# EAGLE board ITG-3200_Breakout-Panel-v12 (EAGLE 6.5.0), part 1 of 3
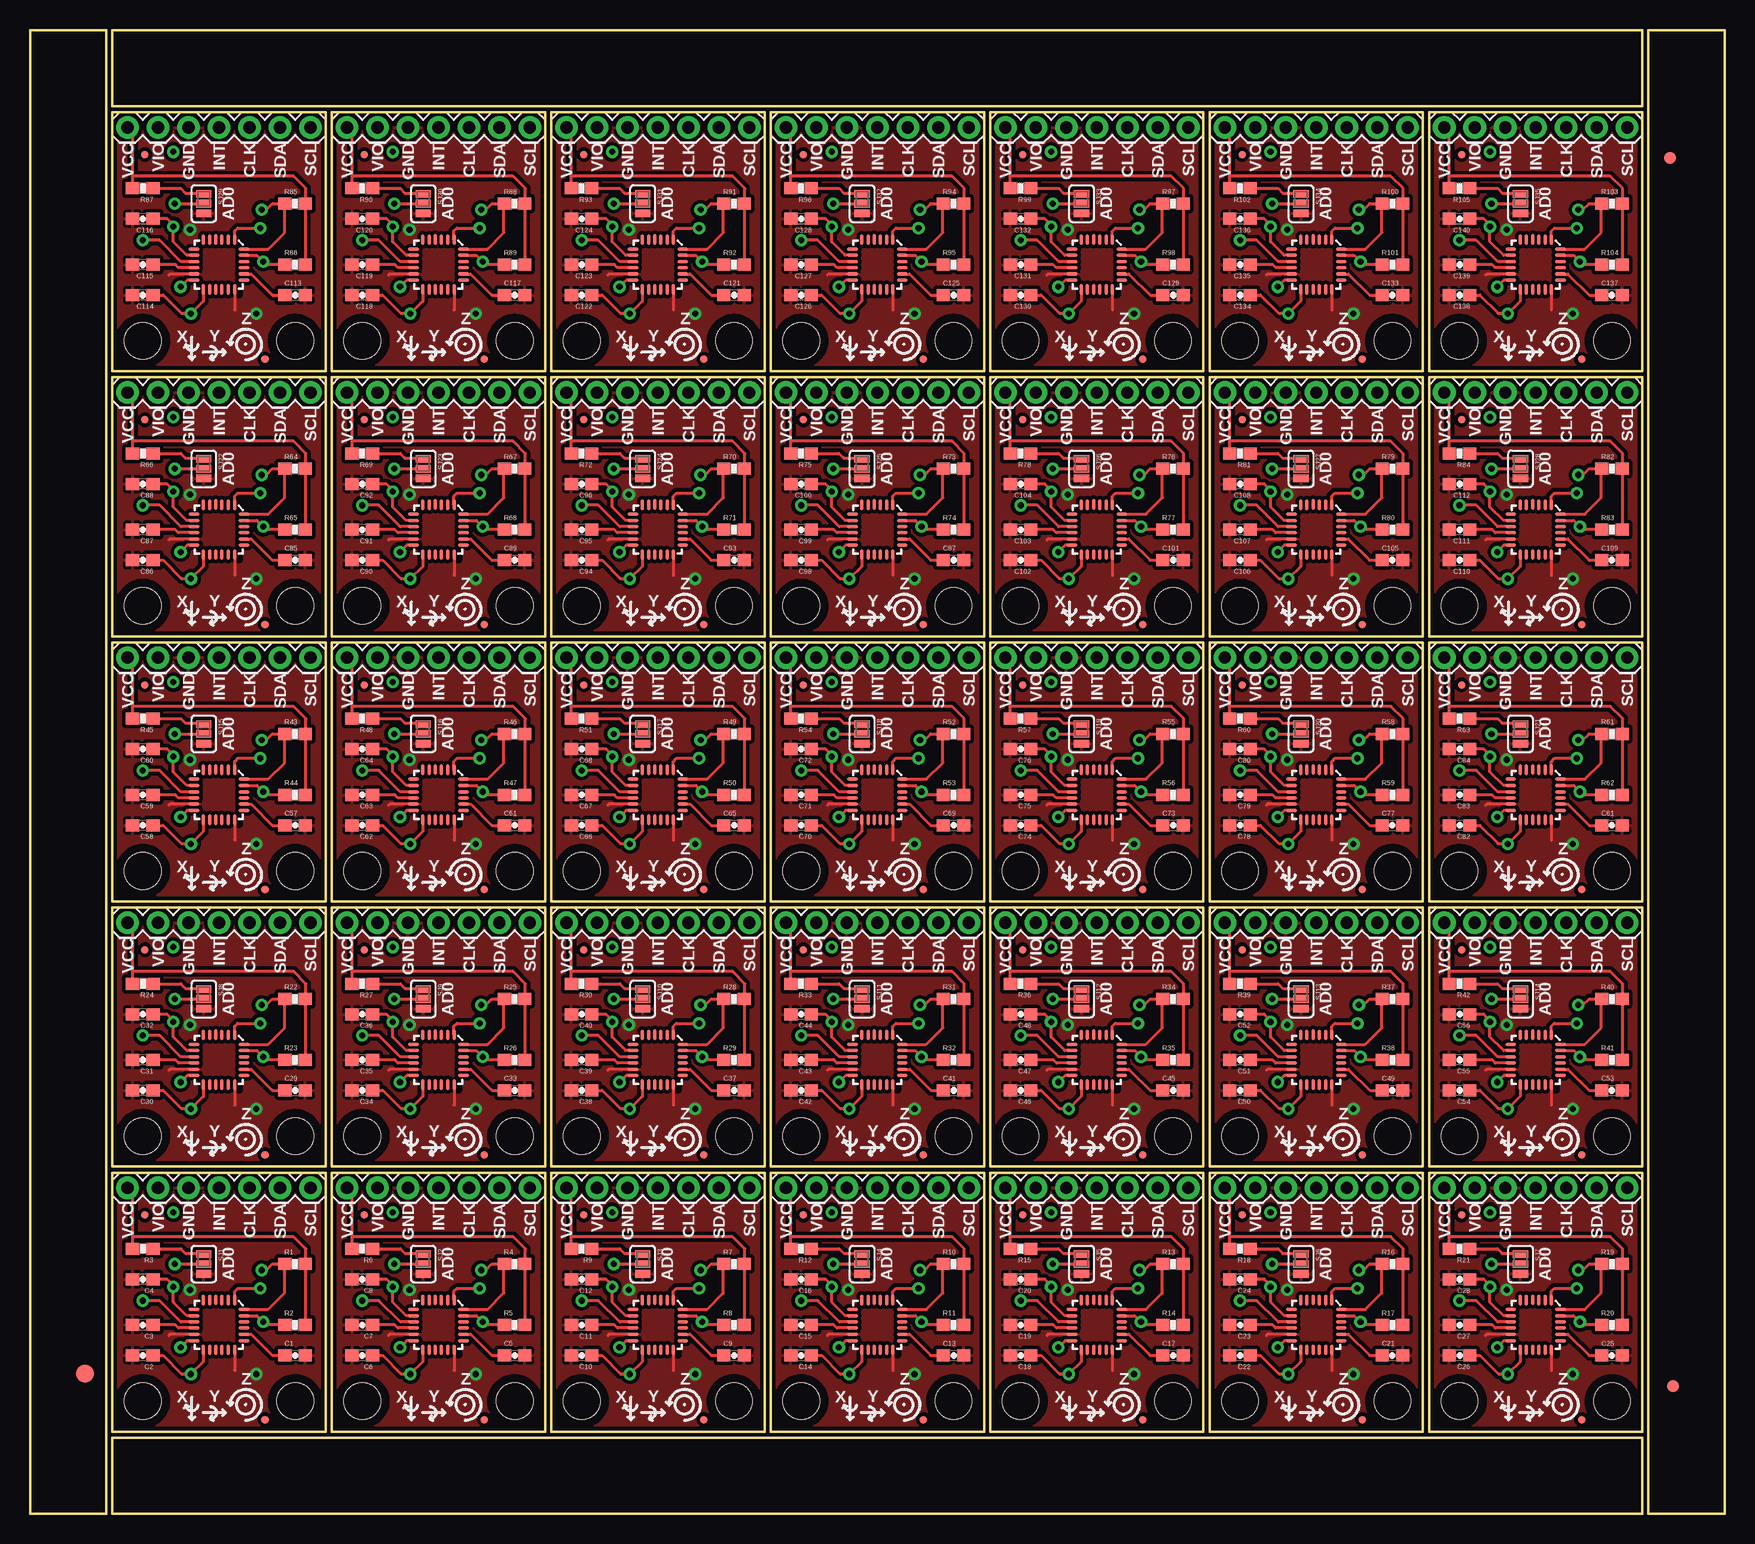
[diagram p0: board, top side]
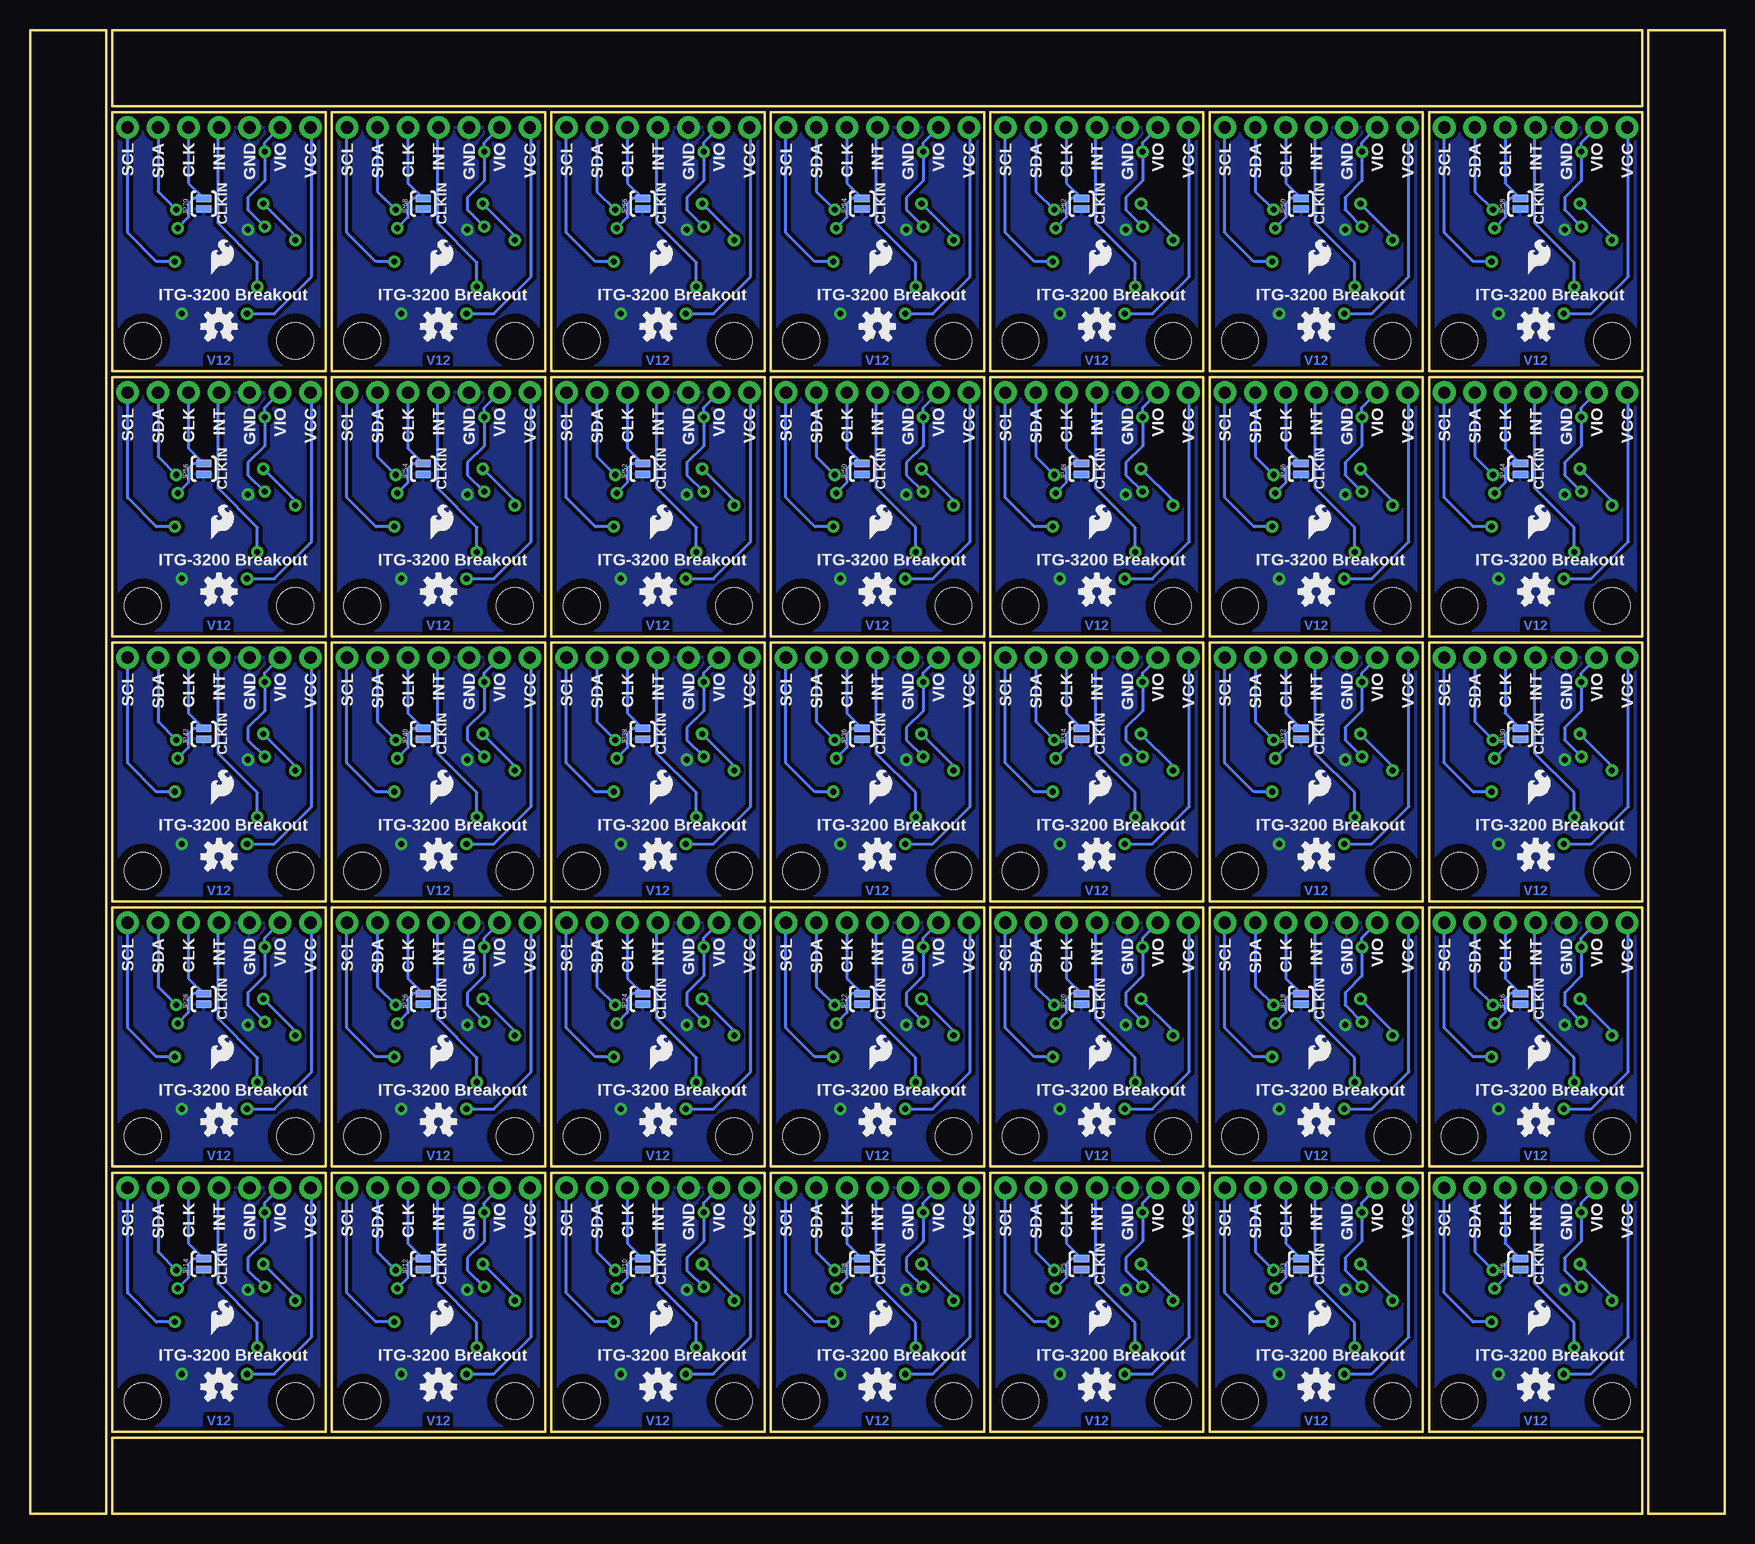
[diagram p1: board, bottom side, seen from below]

Size 141.22 x 123.7 mm. Coordinates in mm from the lower left corner, seen from the top.
Outline: 158 segments
Copper layers (1*16): Top 0.035mm / dielectric 1.5mm / Bottom 0.035mm
Design rules "SparkFun": minimum track width 7mil, minimum drill 15mil, track to track 8mil, track to pad 8mil, pad to pad 8mil, via to via 8mil, smd to smd 8mil, copper to edge 8mil, drill to drill 8mil, minimum pad ring 12mil, minimum via ring 10mil, stop-mask expansion 4mil, vias tented up to drill 20mil, thermal gap 10mil
tRestrict: area 17.2,13.3 to 17.4,14; area 35.5,13.3 to 35.7,14; area 53.8,13.3 to 54,14; area 72.1,13.3 to 72.3,14; area 90.3,13.3 to 90.6,14; area 108.6,13.3 to 108.9,14; area 126.9,13.3 to 127.2,14; area 17.2,35.4 to 17.4,36.1; area 35.5,35.4 to 35.7,36.1; area 53.8,35.4 to 54,36.1; area 72.1,35.4 to 72.3,36.1; area 90.3,35.4 to 90.6,36.1; 23 more areas

## Footprints (pad centres in the part's own frame; a part is rotated, then mirrored left to right if it is on the bottom)
0603-CAP = smd 1.1 x 1: 1 -0.85,0; 2 0.85,0
FIDUCIAL-1.5X3 = smd 1.5 x 1.5: 1 0,0
FIDUCIAL-1X2 = smd 1 x 1: 1 0,0
MICRO-FIDUCIAL = smd 0.635 x 0.635: 1 0,0
1X07 = drill 1.016 pad 1.88: 1 0,0; 2 2.54,0; 3 5.08,0; 4 7.62,0; 5 10.16,0; 6 12.7,0; 7 15.24,0
SJ_2S-NO = smd 0.635 x 1.27: 1 -0.45,0; 2 0.45,0
0603-RES = smd 1.1 x 1: 1 -0.85,0; 2 0.85,0
SJ_3_PASTE1&2 = smd 0.635 x 1.27: 1 -0.813,0; 2 0,0; 3 0.813,0
QFN-24_ITG3200_1:1 = smd 0.889 x 0.279: 1 -2.076,1.301; 2 -2.076,0.775; 3 -2.076,0.25; 4 -2.102,-0.25; 5 -2.076,-0.775; 6 -2.076,-1.301; 13 2.076,-1.301; 14 2.076,-0.775; 15 2.076,-0.25; 16 2.076,0.25; 17 2.076,0.775; 18 2.076,1.301 | smd 0.279 x 0.889: 7 -1.301,-2.076; 8 -0.775,-2.076; 9 -0.25,-2.076; 10 0.25,-2.076; 11 0.775,-2.076; 12 1.301,-2.076; 19 1.301,2.076; 20 0.775,2.076; 21 0.25,2.076; 22 -0.25,2.076; 23 -0.775,2.076; 24 -1.301,2.076
STAND-OFF-TIGHT = hole 3.048: 0,0

## Placement (x,y rotation side)
C1  2.2nF  [0603-CAP]  22.1,13.21 0 top
C2  0.1uF  [0603-CAP]  9.4,13.21 180 top
C3  0.1uF  [0603-CAP]  9.4,15.75 180 top
C4  10nF  [0603-CAP]  9.4,19.56 180 top
C5  2.2nF  [0603-CAP]  40.39,13.21 0 top
C6  0.1uF  [0603-CAP]  27.69,13.21 180 top
C7  0.1uF  [0603-CAP]  27.69,15.75 180 top
C8  10nF  [0603-CAP]  27.69,19.56 180 top
C9  2.2nF  [0603-CAP]  58.67,13.21 0 top
C10  0.1uF  [0603-CAP]  45.97,13.21 180 top
C11  0.1uF  [0603-CAP]  45.97,15.75 180 top
C12  10nF  [0603-CAP]  45.97,19.56 180 top
C13  2.2nF  [0603-CAP]  76.96,13.21 0 top
C14  0.1uF  [0603-CAP]  64.26,13.21 180 top
C15  0.1uF  [0603-CAP]  64.26,15.75 180 top
C16  10nF  [0603-CAP]  64.26,19.56 180 top
C17  2.2nF  [0603-CAP]  95.25,13.21 0 top
C18  0.1uF  [0603-CAP]  82.55,13.21 180 top
C19  0.1uF  [0603-CAP]  82.55,15.75 180 top
C20  10nF  [0603-CAP]  82.55,19.56 180 top
C21  2.2nF  [0603-CAP]  113.54,13.21 0 top
C22  0.1uF  [0603-CAP]  100.84,13.21 180 top
C23  0.1uF  [0603-CAP]  100.84,15.75 180 top
C24  10nF  [0603-CAP]  100.84,19.56 180 top
C25  2.2nF  [0603-CAP]  131.83,13.21 0 top
C26  0.1uF  [0603-CAP]  119.13,13.21 180 top
C27  0.1uF  [0603-CAP]  119.13,15.75 180 top
C28  10nF  [0603-CAP]  119.13,19.56 180 top
C29  2.2nF  [0603-CAP]  22.1,35.31 0 top
C30  0.1uF  [0603-CAP]  9.4,35.31 180 top
C31  0.1uF  [0603-CAP]  9.4,37.85 180 top
C32  10nF  [0603-CAP]  9.4,41.66 180 top
C33  2.2nF  [0603-CAP]  40.39,35.31 0 top
C34  0.1uF  [0603-CAP]  27.69,35.31 180 top
C35  0.1uF  [0603-CAP]  27.69,37.85 180 top
C36  10nF  [0603-CAP]  27.69,41.66 180 top
C37  2.2nF  [0603-CAP]  58.67,35.31 0 top
C38  0.1uF  [0603-CAP]  45.97,35.31 180 top
C39  0.1uF  [0603-CAP]  45.97,37.85 180 top
C40  10nF  [0603-CAP]  45.97,41.66 180 top
C41  2.2nF  [0603-CAP]  76.96,35.31 0 top
C42  0.1uF  [0603-CAP]  64.26,35.31 180 top
C43  0.1uF  [0603-CAP]  64.26,37.85 180 top
C44  10nF  [0603-CAP]  64.26,41.66 180 top
C45  2.2nF  [0603-CAP]  95.25,35.31 0 top
C46  0.1uF  [0603-CAP]  82.55,35.31 180 top
C47  0.1uF  [0603-CAP]  82.55,37.85 180 top
C48  10nF  [0603-CAP]  82.55,41.66 180 top
C49  2.2nF  [0603-CAP]  113.54,35.31 0 top
C50  0.1uF  [0603-CAP]  100.84,35.31 180 top
C51  0.1uF  [0603-CAP]  100.84,37.85 180 top
C52  10nF  [0603-CAP]  100.84,41.66 180 top
C53  2.2nF  [0603-CAP]  131.83,35.31 0 top
C54  0.1uF  [0603-CAP]  119.13,35.31 180 top
C55  0.1uF  [0603-CAP]  119.13,37.85 180 top
C56  10nF  [0603-CAP]  119.13,41.66 180 top
C57  2.2nF  [0603-CAP]  22.1,57.4 0 top
C58  0.1uF  [0603-CAP]  9.4,57.4 180 top
C59  0.1uF  [0603-CAP]  9.4,59.94 180 top
C60  10nF  [0603-CAP]  9.4,63.75 180 top
C61  2.2nF  [0603-CAP]  40.39,57.4 0 top
C62  0.1uF  [0603-CAP]  27.69,57.4 180 top
C63  0.1uF  [0603-CAP]  27.69,59.94 180 top
C64  10nF  [0603-CAP]  27.69,63.75 180 top
C65  2.2nF  [0603-CAP]  58.67,57.4 0 top
C66  0.1uF  [0603-CAP]  45.97,57.4 180 top
C67  0.1uF  [0603-CAP]  45.97,59.94 180 top
C68  10nF  [0603-CAP]  45.97,63.75 180 top
C69  2.2nF  [0603-CAP]  76.96,57.4 0 top
C70  0.1uF  [0603-CAP]  64.26,57.4 180 top
C71  0.1uF  [0603-CAP]  64.26,59.94 180 top
C72  10nF  [0603-CAP]  64.26,63.75 180 top
C73  2.2nF  [0603-CAP]  95.25,57.4 0 top
C74  0.1uF  [0603-CAP]  82.55,57.4 180 top
C75  0.1uF  [0603-CAP]  82.55,59.94 180 top
C76  10nF  [0603-CAP]  82.55,63.75 180 top
C77  2.2nF  [0603-CAP]  113.54,57.4 0 top
C78  0.1uF  [0603-CAP]  100.84,57.4 180 top
C79  0.1uF  [0603-CAP]  100.84,59.94 180 top
C80  10nF  [0603-CAP]  100.84,63.75 180 top
C81  2.2nF  [0603-CAP]  131.83,57.4 0 top
C82  0.1uF  [0603-CAP]  119.13,57.4 180 top
C83  0.1uF  [0603-CAP]  119.13,59.94 180 top
C84  10nF  [0603-CAP]  119.13,63.75 180 top
C85  2.2nF  [0603-CAP]  22.1,79.5 0 top
C86  0.1uF  [0603-CAP]  9.4,79.5 180 top
C87  0.1uF  [0603-CAP]  9.4,82.04 180 top
C88  10nF  [0603-CAP]  9.4,85.85 180 top
C89  2.2nF  [0603-CAP]  40.39,79.5 0 top
C90  0.1uF  [0603-CAP]  27.69,79.5 180 top
C91  0.1uF  [0603-CAP]  27.69,82.04 180 top
C92  10nF  [0603-CAP]  27.69,85.85 180 top
C93  2.2nF  [0603-CAP]  58.67,79.5 0 top
C94  0.1uF  [0603-CAP]  45.97,79.5 180 top
C95  0.1uF  [0603-CAP]  45.97,82.04 180 top
C96  10nF  [0603-CAP]  45.97,85.85 180 top
C97  2.2nF  [0603-CAP]  76.96,79.5 0 top
C98  0.1uF  [0603-CAP]  64.26,79.5 180 top
C99  0.1uF  [0603-CAP]  64.26,82.04 180 top
C100  10nF  [0603-CAP]  64.26,85.85 180 top
C101  2.2nF  [0603-CAP]  95.25,79.5 0 top
C102  0.1uF  [0603-CAP]  82.55,79.5 180 top
C103  0.1uF  [0603-CAP]  82.55,82.04 180 top
C104  10nF  [0603-CAP]  82.55,85.85 180 top
C105  2.2nF  [0603-CAP]  113.54,79.5 0 top
C106  0.1uF  [0603-CAP]  100.84,79.5 180 top
C107  0.1uF  [0603-CAP]  100.84,82.04 180 top
C108  10nF  [0603-CAP]  100.84,85.85 180 top
C109  2.2nF  [0603-CAP]  131.83,79.5 0 top
C110  0.1uF  [0603-CAP]  119.13,79.5 180 top
C111  0.1uF  [0603-CAP]  119.13,82.04 180 top
C112  10nF  [0603-CAP]  119.13,85.85 180 top
C113  2.2nF  [0603-CAP]  22.1,101.6 0 top
C114  0.1uF  [0603-CAP]  9.4,101.6 180 top
C115  0.1uF  [0603-CAP]  9.4,104.14 180 top
C116  10nF  [0603-CAP]  9.4,107.95 180 top
C117  2.2nF  [0603-CAP]  40.39,101.6 0 top
C118  0.1uF  [0603-CAP]  27.69,101.6 180 top
C119  0.1uF  [0603-CAP]  27.69,104.14 180 top
C120  10nF  [0603-CAP]  27.69,107.95 180 top
C121  2.2nF  [0603-CAP]  58.67,101.6 0 top
C122  0.1uF  [0603-CAP]  45.97,101.6 180 top
C123  0.1uF  [0603-CAP]  45.97,104.14 180 top
C124  10nF  [0603-CAP]  45.97,107.95 180 top
C125  2.2nF  [0603-CAP]  76.96,101.6 0 top
C126  0.1uF  [0603-CAP]  64.26,101.6 180 top
C127  0.1uF  [0603-CAP]  64.26,104.14 180 top
C128  10nF  [0603-CAP]  64.26,107.95 180 top
C129  2.2nF  [0603-CAP]  95.25,101.6 0 top
C130  0.1uF  [0603-CAP]  82.55,101.6 180 top
C131  0.1uF  [0603-CAP]  82.55,104.14 180 top
C132  10nF  [0603-CAP]  82.55,107.95 180 top
C133  2.2nF  [0603-CAP]  113.54,101.6 0 top
C134  0.1uF  [0603-CAP]  100.84,101.6 180 top
C135  0.1uF  [0603-CAP]  100.84,104.14 180 top
C136  10nF  [0603-CAP]  100.84,107.95 180 top
C137  2.2nF  [0603-CAP]  131.83,101.6 0 top
C138  0.1uF  [0603-CAP]  119.13,101.6 180 top
C139  0.1uF  [0603-CAP]  119.13,104.14 180 top
C140  10nF  [0603-CAP]  119.13,107.95 180 top
E$1  [FIDUCIAL-1.5X3]  4.57,11.68 0 top
E$4  [FIDUCIAL-1X2]  136.91,10.67 0 top
E$5  [FIDUCIAL-1X2]  136.65,113.03 180 top
FID1  FIDUCIALUFIDUCIAL  [MICRO-FIDUCIAL]  9.58,24.92 0 top
FID2  FIDUCIALUFIDUCIAL  [MICRO-FIDUCIAL]  19.58,7.85 0 top
FID3  FIDUCIALUFIDUCIAL  [MICRO-FIDUCIAL]  27.86,24.92 0 top
FID4  FIDUCIALUFIDUCIAL  [MICRO-FIDUCIAL]  37.87,7.85 0 top
FID5  FIDUCIALUFIDUCIAL  [MICRO-FIDUCIAL]  46.15,24.92 0 top
FID6  FIDUCIALUFIDUCIAL  [MICRO-FIDUCIAL]  56.16,7.85 0 top
FID7  FIDUCIALUFIDUCIAL  [MICRO-FIDUCIAL]  64.44,24.92 0 top
FID8  FIDUCIALUFIDUCIAL  [MICRO-FIDUCIAL]  74.45,7.85 0 top
FID9  FIDUCIALUFIDUCIAL  [MICRO-FIDUCIAL]  82.73,24.92 0 top
FID10  FIDUCIALUFIDUCIAL  [MICRO-FIDUCIAL]  92.74,7.85 0 top
FID11  FIDUCIALUFIDUCIAL  [MICRO-FIDUCIAL]  101.02,24.92 0 top
FID12  FIDUCIALUFIDUCIAL  [MICRO-FIDUCIAL]  111.02,7.85 0 top
FID13  FIDUCIALUFIDUCIAL  [MICRO-FIDUCIAL]  119.3,24.92 0 top
FID14  FIDUCIALUFIDUCIAL  [MICRO-FIDUCIAL]  129.31,7.85 0 top
FID15  FIDUCIALUFIDUCIAL  [MICRO-FIDUCIAL]  9.58,47.02 0 top
FID16  FIDUCIALUFIDUCIAL  [MICRO-FIDUCIAL]  19.58,29.95 0 top
FID17  FIDUCIALUFIDUCIAL  [MICRO-FIDUCIAL]  27.86,47.02 0 top
FID18  FIDUCIALUFIDUCIAL  [MICRO-FIDUCIAL]  37.87,29.95 0 top
FID19  FIDUCIALUFIDUCIAL  [MICRO-FIDUCIAL]  46.15,47.02 0 top
FID20  FIDUCIALUFIDUCIAL  [MICRO-FIDUCIAL]  56.16,29.95 0 top
FID21  FIDUCIALUFIDUCIAL  [MICRO-FIDUCIAL]  64.44,47.02 0 top
FID22  FIDUCIALUFIDUCIAL  [MICRO-FIDUCIAL]  74.45,29.95 0 top
FID23  FIDUCIALUFIDUCIAL  [MICRO-FIDUCIAL]  82.73,47.02 0 top
FID24  FIDUCIALUFIDUCIAL  [MICRO-FIDUCIAL]  92.74,29.95 0 top
FID25  FIDUCIALUFIDUCIAL  [MICRO-FIDUCIAL]  101.02,47.02 0 top
FID26  FIDUCIALUFIDUCIAL  [MICRO-FIDUCIAL]  111.02,29.95 0 top
FID27  FIDUCIALUFIDUCIAL  [MICRO-FIDUCIAL]  119.3,47.02 0 top
FID28  FIDUCIALUFIDUCIAL  [MICRO-FIDUCIAL]  129.31,29.95 0 top
FID29  FIDUCIALUFIDUCIAL  [MICRO-FIDUCIAL]  9.58,69.11 0 top
FID30  FIDUCIALUFIDUCIAL  [MICRO-FIDUCIAL]  19.58,52.04 0 top
FID31  FIDUCIALUFIDUCIAL  [MICRO-FIDUCIAL]  27.86,69.11 0 top
FID32  FIDUCIALUFIDUCIAL  [MICRO-FIDUCIAL]  37.87,52.04 0 top
FID33  FIDUCIALUFIDUCIAL  [MICRO-FIDUCIAL]  46.15,69.11 0 top
FID34  FIDUCIALUFIDUCIAL  [MICRO-FIDUCIAL]  56.16,52.04 0 top
FID35  FIDUCIALUFIDUCIAL  [MICRO-FIDUCIAL]  64.44,69.11 0 top
FID36  FIDUCIALUFIDUCIAL  [MICRO-FIDUCIAL]  74.45,52.04 0 top
FID37  FIDUCIALUFIDUCIAL  [MICRO-FIDUCIAL]  82.73,69.11 0 top
FID38  FIDUCIALUFIDUCIAL  [MICRO-FIDUCIAL]  92.74,52.04 0 top
FID39  FIDUCIALUFIDUCIAL  [MICRO-FIDUCIAL]  101.02,69.11 0 top
FID40  FIDUCIALUFIDUCIAL  [MICRO-FIDUCIAL]  111.02,52.04 0 top
FID41  FIDUCIALUFIDUCIAL  [MICRO-FIDUCIAL]  119.3,69.11 0 top
FID42  FIDUCIALUFIDUCIAL  [MICRO-FIDUCIAL]  129.31,52.04 0 top
FID43  FIDUCIALUFIDUCIAL  [MICRO-FIDUCIAL]  9.58,91.21 0 top
FID44  FIDUCIALUFIDUCIAL  [MICRO-FIDUCIAL]  19.58,74.14 0 top
FID45  FIDUCIALUFIDUCIAL  [MICRO-FIDUCIAL]  27.86,91.21 0 top
FID46  FIDUCIALUFIDUCIAL  [MICRO-FIDUCIAL]  37.87,74.14 0 top
FID47  FIDUCIALUFIDUCIAL  [MICRO-FIDUCIAL]  46.15,91.21 0 top
FID48  FIDUCIALUFIDUCIAL  [MICRO-FIDUCIAL]  56.16,74.14 0 top
FID49  FIDUCIALUFIDUCIAL  [MICRO-FIDUCIAL]  64.44,91.21 0 top
FID50  FIDUCIALUFIDUCIAL  [MICRO-FIDUCIAL]  74.45,74.14 0 top
FID51  FIDUCIALUFIDUCIAL  [MICRO-FIDUCIAL]  82.73,91.21 0 top
FID52  FIDUCIALUFIDUCIAL  [MICRO-FIDUCIAL]  92.74,74.14 0 top
FID53  FIDUCIALUFIDUCIAL  [MICRO-FIDUCIAL]  101.02,91.21 0 top
FID54  FIDUCIALUFIDUCIAL  [MICRO-FIDUCIAL]  111.02,74.14 0 top
FID55  FIDUCIALUFIDUCIAL  [MICRO-FIDUCIAL]  119.3,91.21 0 top
FID56  FIDUCIALUFIDUCIAL  [MICRO-FIDUCIAL]  129.31,74.14 0 top
FID57  FIDUCIALUFIDUCIAL  [MICRO-FIDUCIAL]  9.58,113.31 0 top
FID58  FIDUCIALUFIDUCIAL  [MICRO-FIDUCIAL]  19.58,96.24 0 top
FID59  FIDUCIALUFIDUCIAL  [MICRO-FIDUCIAL]  27.86,113.31 0 top
FID60  FIDUCIALUFIDUCIAL  [MICRO-FIDUCIAL]  37.87,96.24 0 top
FID61  FIDUCIALUFIDUCIAL  [MICRO-FIDUCIAL]  46.15,113.31 0 top
FID62  FIDUCIALUFIDUCIAL  [MICRO-FIDUCIAL]  56.16,96.24 0 top
FID63  FIDUCIALUFIDUCIAL  [MICRO-FIDUCIAL]  64.44,113.31 0 top
FID64  FIDUCIALUFIDUCIAL  [MICRO-FIDUCIAL]  74.45,96.24 0 top
FID65  FIDUCIALUFIDUCIAL  [MICRO-FIDUCIAL]  82.73,113.31 0 top
FID66  FIDUCIALUFIDUCIAL  [MICRO-FIDUCIAL]  92.74,96.24 0 top
FID67  FIDUCIALUFIDUCIAL  [MICRO-FIDUCIAL]  101.02,113.31 0 top
FID68  FIDUCIALUFIDUCIAL  [MICRO-FIDUCIAL]  111.02,96.24 0 top
FID69  FIDUCIALUFIDUCIAL  [MICRO-FIDUCIAL]  119.3,113.31 0 top
FID70  FIDUCIALUFIDUCIAL  [MICRO-FIDUCIAL]  129.31,96.24 0 top
JP1  [1X07]  26.42,27.18 0 top
JP2  [1X07]  8.13,27.18 0 top
JP3  [SJ_2S-NO]  35.31,20.83 90 bottom
JP4  [1X07]  44.7,27.18 0 top
JP5  [SJ_2S-NO]  53.59,20.83 90 bottom
JP6  [SJ_2S-NO]  17.02,20.83 90 bottom
JP7  [1X07]  62.99,27.18 0 top
JP8  [SJ_2S-NO]  71.88,20.83 90 bottom
JP9  [1X07]  81.28,27.18 0 top
JP10  [SJ_2S-NO]  90.17,20.83 90 bottom
JP11  [1X07]  99.57,27.18 0 top
JP12  [SJ_2S-NO]  108.46,20.83 90 bottom
JP13  [1X07]  117.86,27.18 0 top
JP14  [SJ_2S-NO]  126.75,20.83 90 bottom
JP15  [1X07]  8.13,49.28 0 top
JP16  [SJ_2S-NO]  17.02,42.93 90 bottom
JP17  [1X07]  26.42,49.28 0 top
JP18  [SJ_2S-NO]  35.31,42.93 90 bottom
JP19  [1X07]  44.7,49.28 0 top
JP20  [SJ_2S-NO]  53.59,42.93 90 bottom
JP21  [1X07]  62.99,49.28 0 top
JP22  [SJ_2S-NO]  71.88,42.93 90 bottom
JP23  [1X07]  81.28,49.28 0 top
JP24  [SJ_2S-NO]  90.17,42.93 90 bottom
JP25  [1X07]  99.57,49.28 0 top
JP26  [SJ_2S-NO]  108.46,42.93 90 bottom
JP27  [1X07]  117.86,49.28 0 top
JP28  [SJ_2S-NO]  126.75,42.93 90 bottom
JP29  [1X07]  8.13,71.37 0 top
JP30  [SJ_2S-NO]  17.02,65.02 90 bottom
JP31  [1X07]  26.42,71.37 0 top
JP32  [SJ_2S-NO]  35.31,65.02 90 bottom
JP33  [1X07]  44.7,71.37 0 top
JP34  [SJ_2S-NO]  53.59,65.02 90 bottom
JP35  [1X07]  62.99,71.37 0 top
JP36  [SJ_2S-NO]  71.88,65.02 90 bottom
JP37  [1X07]  81.28,71.37 0 top
JP38  [SJ_2S-NO]  90.17,65.02 90 bottom
JP39  [1X07]  99.57,71.37 0 top
JP40  [SJ_2S-NO]  108.46,65.02 90 bottom
JP41  [1X07]  117.86,71.37 0 top
JP42  [SJ_2S-NO]  126.75,65.02 90 bottom
JP43  [1X07]  8.13,93.47 0 top
JP44  [SJ_2S-NO]  17.02,87.12 90 bottom
JP45  [1X07]  26.42,93.47 0 top
JP46  [SJ_2S-NO]  35.31,87.12 90 bottom
JP47  [1X07]  44.7,93.47 0 top
JP48  [SJ_2S-NO]  53.59,87.12 90 bottom
JP49  [1X07]  62.99,93.47 0 top
JP50  [SJ_2S-NO]  71.88,87.12 90 bottom
JP51  [1X07]  81.28,93.47 0 top
JP52  [SJ_2S-NO]  90.17,87.12 90 bottom
JP53  [1X07]  99.57,93.47 0 top
JP54  [SJ_2S-NO]  108.46,87.12 90 bottom
JP55  [1X07]  117.86,93.47 0 top
JP56  [SJ_2S-NO]  126.75,87.12 90 bottom
JP57  [1X07]  8.13,115.57 0 top
JP58  [SJ_2S-NO]  17.02,109.22 90 bottom
JP59  [1X07]  26.42,115.57 0 top
JP60  [SJ_2S-NO]  35.31,109.22 90 bottom
JP61  [1X07]  44.7,115.57 0 top
JP62  [SJ_2S-NO]  53.59,109.22 90 bottom
JP63  [1X07]  62.99,115.57 0 top
JP64  [SJ_2S-NO]  71.88,109.22 90 bottom
JP65  [1X07]  81.28,115.57 0 top
JP66  [SJ_2S-NO]  90.17,109.22 90 bottom
JP67  [1X07]  99.57,115.57 0 top
JP68  [SJ_2S-NO]  108.46,109.22 90 bottom
JP69  [1X07]  117.86,115.57 0 top
JP70  [SJ_2S-NO]  126.75,109.22 90 bottom
LOGO1  OSHW-LOGOS  [OSHW-LOGO-S]  15.75,10.59 0 bottom
LOGO2  LOGO-SFESK  [SFE-LOGO-FLAME]  16.38,14.99 0 bottom
LOGO3  OSHW-LOGOS  [OSHW-LOGO-S]  34.04,10.59 0 bottom
LOGO4  LOGO-SFESK  [SFE-LOGO-FLAME]  34.67,14.99 0 bottom
LOGO5  OSHW-LOGOS  [OSHW-LOGO-S]  52.32,10.59 0 bottom
LOGO6  LOGO-SFESK  [SFE-LOGO-FLAME]  52.96,14.99 0 bottom
LOGO7  OSHW-LOGOS  [OSHW-LOGO-S]  70.61,10.59 0 bottom
LOGO8  LOGO-SFESK  [SFE-LOGO-FLAME]  71.25,14.99 0 bottom
LOGO9  OSHW-LOGOS  [OSHW-LOGO-S]  88.9,10.59 0 bottom
LOGO10  LOGO-SFESK  [SFE-LOGO-FLAME]  89.54,14.99 0 bottom
LOGO11  OSHW-LOGOS  [OSHW-LOGO-S]  107.19,10.59 0 bottom
LOGO12  LOGO-SFESK  [SFE-LOGO-FLAME]  107.82,14.99 0 bottom
LOGO13  OSHW-LOGOS  [OSHW-LOGO-S]  125.48,10.59 0 bottom
LOGO14  LOGO-SFESK  [SFE-LOGO-FLAME]  126.11,14.99 0 bottom
LOGO15  OSHW-LOGOS  [OSHW-LOGO-S]  15.75,32.69 0 bottom
LOGO16  LOGO-SFESK  [SFE-LOGO-FLAME]  16.38,37.08 0 bottom
LOGO17  OSHW-LOGOS  [OSHW-LOGO-S]  34.04,32.69 0 bottom
LOGO18  LOGO-SFESK  [SFE-LOGO-FLAME]  34.67,37.08 0 bottom
LOGO19  OSHW-LOGOS  [OSHW-LOGO-S]  52.32,32.69 0 bottom
LOGO20  LOGO-SFESK  [SFE-LOGO-FLAME]  52.96,37.08 0 bottom
LOGO21  OSHW-LOGOS  [OSHW-LOGO-S]  70.61,32.69 0 bottom
LOGO22  LOGO-SFESK  [SFE-LOGO-FLAME]  71.25,37.08 0 bottom
LOGO23  OSHW-LOGOS  [OSHW-LOGO-S]  88.9,32.69 0 bottom
LOGO24  LOGO-SFESK  [SFE-LOGO-FLAME]  89.54,37.08 0 bottom
LOGO25  OSHW-LOGOS  [OSHW-LOGO-S]  107.19,32.69 0 bottom
LOGO26  LOGO-SFESK  [SFE-LOGO-FLAME]  107.82,37.08 0 bottom
LOGO27  OSHW-LOGOS  [OSHW-LOGO-S]  125.48,32.69 0 bottom
LOGO28  LOGO-SFESK  [SFE-LOGO-FLAME]  126.11,37.08 0 bottom
LOGO29  OSHW-LOGOS  [OSHW-LOGO-S]  15.75,54.79 0 bottom
LOGO30  LOGO-SFESK  [SFE-LOGO-FLAME]  16.38,59.18 0 bottom
LOGO31  OSHW-LOGOS  [OSHW-LOGO-S]  34.04,54.79 0 bottom
LOGO32  LOGO-SFESK  [SFE-LOGO-FLAME]  34.67,59.18 0 bottom
LOGO33  OSHW-LOGOS  [OSHW-LOGO-S]  52.32,54.79 0 bottom
LOGO34  LOGO-SFESK  [SFE-LOGO-FLAME]  52.96,59.18 0 bottom
LOGO35  OSHW-LOGOS  [OSHW-LOGO-S]  70.61,54.79 0 bottom
LOGO36  LOGO-SFESK  [SFE-LOGO-FLAME]  71.25,59.18 0 bottom
LOGO37  OSHW-LOGOS  [OSHW-LOGO-S]  88.9,54.79 0 bottom
LOGO38  LOGO-SFESK  [SFE-LOGO-FLAME]  89.54,59.18 0 bottom
LOGO39  OSHW-LOGOS  [OSHW-LOGO-S]  107.19,54.79 0 bottom
LOGO40  LOGO-SFESK  [SFE-LOGO-FLAME]  107.82,59.18 0 bottom
LOGO41  OSHW-LOGOS  [OSHW-LOGO-S]  125.48,54.79 0 bottom
LOGO42  LOGO-SFESK  [SFE-LOGO-FLAME]  126.11,59.18 0 bottom
LOGO43  OSHW-LOGOS  [OSHW-LOGO-S]  15.75,76.89 0 bottom
LOGO44  LOGO-SFESK  [SFE-LOGO-FLAME]  16.38,81.28 0 bottom
LOGO45  OSHW-LOGOS  [OSHW-LOGO-S]  34.04,76.89 0 bottom
LOGO46  LOGO-SFESK  [SFE-LOGO-FLAME]  34.67,81.28 0 bottom
LOGO47  OSHW-LOGOS  [OSHW-LOGO-S]  52.32,76.89 0 bottom
LOGO48  LOGO-SFESK  [SFE-LOGO-FLAME]  52.96,81.28 0 bottom
LOGO49  OSHW-LOGOS  [OSHW-LOGO-S]  70.61,76.89 0 bottom
LOGO50  LOGO-SFESK  [SFE-LOGO-FLAME]  71.25,81.28 0 bottom
LOGO51  OSHW-LOGOS  [OSHW-LOGO-S]  88.9,76.89 0 bottom
LOGO52  LOGO-SFESK  [SFE-LOGO-FLAME]  89.54,81.28 0 bottom
LOGO53  OSHW-LOGOS  [OSHW-LOGO-S]  107.19,76.89 0 bottom
LOGO54  LOGO-SFESK  [SFE-LOGO-FLAME]  107.82,81.28 0 bottom
LOGO55  OSHW-LOGOS  [OSHW-LOGO-S]  125.48,76.89 0 bottom
LOGO56  LOGO-SFESK  [SFE-LOGO-FLAME]  126.11,81.28 0 bottom
LOGO57  OSHW-LOGOS  [OSHW-LOGO-S]  15.75,98.98 0 bottom
LOGO58  LOGO-SFESK  [SFE-LOGO-FLAME]  16.38,103.38 0 bottom
LOGO59  OSHW-LOGOS  [OSHW-LOGO-S]  34.04,98.98 0 bottom
LOGO60  LOGO-SFESK  [SFE-LOGO-FLAME]  34.67,103.38 0 bottom
LOGO61  OSHW-LOGOS  [OSHW-LOGO-S]  52.32,98.98 0 bottom
LOGO62  LOGO-SFESK  [SFE-LOGO-FLAME]  52.96,103.38 0 bottom
LOGO63  OSHW-LOGOS  [OSHW-LOGO-S]  70.61,98.98 0 bottom
LOGO64  LOGO-SFESK  [SFE-LOGO-FLAME]  71.25,103.38 0 bottom
LOGO65  OSHW-LOGOS  [OSHW-LOGO-S]  88.9,98.98 0 bottom
LOGO66  LOGO-SFESK  [SFE-LOGO-FLAME]  89.54,103.38 0 bottom
LOGO67  OSHW-LOGOS  [OSHW-LOGO-S]  107.19,98.98 0 bottom
LOGO68  LOGO-SFESK  [SFE-LOGO-FLAME]  107.82,103.38 0 bottom
LOGO69  OSHW-LOGOS  [OSHW-LOGO-S]  125.48,98.98 0 bottom
LOGO70  LOGO-SFESK  [SFE-LOGO-FLAME]  126.11,103.38 0 bottom
R1  DNP  [0603-RES]  22.1,20.83 0 top
R2  DNP  [0603-RES]  22.1,15.75 0 top
R3  10K  [0603-RES]  9.4,22.1 180 top
R4  DNP  [0603-RES]  40.39,20.83 0 top
R5  DNP  [0603-RES]  40.39,15.75 0 top
R6  10K  [0603-RES]  27.69,22.1 180 top
R7  DNP  [0603-RES]  58.67,20.83 0 top
R8  DNP  [0603-RES]  58.67,15.75 0 top
R9  10K  [0603-RES]  45.97,22.1 180 top
R10  DNP  [0603-RES]  76.96,20.83 0 top
R11  DNP  [0603-RES]  76.96,15.75 0 top
R12  10K  [0603-RES]  64.26,22.1 180 top
R13  DNP  [0603-RES]  95.25,20.83 0 top
R14  DNP  [0603-RES]  95.25,15.75 0 top
R15  10K  [0603-RES]  82.55,22.1 180 top
R16  DNP  [0603-RES]  113.54,20.83 0 top
R17  DNP  [0603-RES]  113.54,15.75 0 top
R18  10K  [0603-RES]  100.84,22.1 180 top
R19  DNP  [0603-RES]  131.83,20.83 0 top
R20  DNP  [0603-RES]  131.83,15.75 0 top
R21  10K  [0603-RES]  119.13,22.1 180 top
R22  DNP  [0603-RES]  22.1,42.93 0 top
R23  DNP  [0603-RES]  22.1,37.85 0 top
R24  10K  [0603-RES]  9.4,44.2 180 top
R25  DNP  [0603-RES]  40.39,42.93 0 top
R26  DNP  [0603-RES]  40.39,37.85 0 top
R27  10K  [0603-RES]  27.69,44.2 180 top
R28  DNP  [0603-RES]  58.67,42.93 0 top
R29  DNP  [0603-RES]  58.67,37.85 0 top
R30  10K  [0603-RES]  45.97,44.2 180 top
R31  DNP  [0603-RES]  76.96,42.93 0 top
R32  DNP  [0603-RES]  76.96,37.85 0 top
R33  10K  [0603-RES]  64.26,44.2 180 top
R34  DNP  [0603-RES]  95.25,42.93 0 top
R35  DNP  [0603-RES]  95.25,37.85 0 top
R36  10K  [0603-RES]  82.55,44.2 180 top
R37  DNP  [0603-RES]  113.54,42.93 0 top
R38  DNP  [0603-RES]  113.54,37.85 0 top
R39  10K  [0603-RES]  100.84,44.2 180 top
R40  DNP  [0603-RES]  131.83,42.93 0 top
R41  DNP  [0603-RES]  131.83,37.85 0 top
R42  10K  [0603-RES]  119.13,44.2 180 top
R43  DNP  [0603-RES]  22.1,65.02 0 top
R44  DNP  [0603-RES]  22.1,59.94 0 top
R45  10K  [0603-RES]  9.4,66.29 180 top
R46  DNP  [0603-RES]  40.39,65.02 0 top
R47  DNP  [0603-RES]  40.39,59.94 0 top
R48  10K  [0603-RES]  27.69,66.29 180 top
R49  DNP  [0603-RES]  58.67,65.02 0 top
R50  DNP  [0603-RES]  58.67,59.94 0 top
R51  10K  [0603-RES]  45.97,66.29 180 top
R52  DNP  [0603-RES]  76.96,65.02 0 top
R53  DNP  [0603-RES]  76.96,59.94 0 top
R54  10K  [0603-RES]  64.26,66.29 180 top
R55  DNP  [0603-RES]  95.25,65.02 0 top
R56  DNP  [0603-RES]  95.25,59.94 0 top
R57  10K  [0603-RES]  82.55,66.29 180 top
R58  DNP  [0603-RES]  113.54,65.02 0 top
R59  DNP  [0603-RES]  113.54,59.94 0 top
R60  10K  [0603-RES]  100.84,66.29 180 top
R61  DNP  [0603-RES]  131.83,65.02 0 top
R62  DNP  [0603-RES]  131.83,59.94 0 top
R63  10K  [0603-RES]  119.13,66.29 180 top
R64  DNP  [0603-RES]  22.1,87.12 0 top
R65  DNP  [0603-RES]  22.1,82.04 0 top
R66  10K  [0603-RES]  9.4,88.39 180 top
R67  DNP  [0603-RES]  40.39,87.12 0 top
R68  DNP  [0603-RES]  40.39,82.04 0 top
R69  10K  [0603-RES]  27.69,88.39 180 top
R70  DNP  [0603-RES]  58.67,87.12 0 top
R71  DNP  [0603-RES]  58.67,82.04 0 top
R72  10K  [0603-RES]  45.97,88.39 180 top
R73  DNP  [0603-RES]  76.96,87.12 0 top
R74  DNP  [0603-RES]  76.96,82.04 0 top
R75  10K  [0603-RES]  64.26,88.39 180 top
R76  DNP  [0603-RES]  95.25,87.12 0 top
R77  DNP  [0603-RES]  95.25,82.04 0 top
R78  10K  [0603-RES]  82.55,88.39 180 top
R79  DNP  [0603-RES]  113.54,87.12 0 top
R80  DNP  [0603-RES]  113.54,82.04 0 top
R81  10K  [0603-RES]  100.84,88.39 180 top
R82  DNP  [0603-RES]  131.83,87.12 0 top
R83  DNP  [0603-RES]  131.83,82.04 0 top
R84  10K  [0603-RES]  119.13,88.39 180 top
R85  DNP  [0603-RES]  22.1,109.22 0 top
R86  DNP  [0603-RES]  22.1,104.14 0 top
R87  10K  [0603-RES]  9.4,110.49 180 top
R88  DNP  [0603-RES]  40.39,109.22 0 top
R89  DNP  [0603-RES]  40.39,104.14 0 top
R90  10K  [0603-RES]  27.69,110.49 180 top
R91  DNP  [0603-RES]  58.67,109.22 0 top
R92  DNP  [0603-RES]  58.67,104.14 0 top
R93  10K  [0603-RES]  45.97,110.49 180 top
R94  DNP  [0603-RES]  76.96,109.22 0 top
R95  DNP  [0603-RES]  76.96,104.14 0 top
R96  10K  [0603-RES]  64.26,110.49 180 top
R97  DNP  [0603-RES]  95.25,109.22 0 top
R98  DNP  [0603-RES]  95.25,104.14 0 top
R99  10K  [0603-RES]  82.55,110.49 180 top
R100  DNP  [0603-RES]  113.54,109.22 0 top
R101  DNP  [0603-RES]  113.54,104.14 0 top
R102  10K  [0603-RES]  100.84,110.49 180 top
R103  DNP  [0603-RES]  131.83,109.22 0 top
R104  DNP  [0603-RES]  131.83,104.14 0 top
R105  10K  [0603-RES]  119.13,110.49 180 top
SJ1  [SJ_3_PASTE1&2]  14.48,20.83 270 top
SJ2  [SJ_3_PASTE1&2]  32.77,20.83 270 top
SJ3  [SJ_3_PASTE1&2]  51.05,20.83 270 top
SJ4  [SJ_3_PASTE1&2]  69.34,20.83 270 top
SJ5  [SJ_3_PASTE1&2]  87.63,20.83 270 top
SJ6  [SJ_3_PASTE1&2]  105.92,20.83 270 top
SJ7  [SJ_3_PASTE1&2]  124.21,20.83 270 top
SJ8  [SJ_3_PASTE1&2]  14.48,42.93 270 top
SJ9  [SJ_3_PASTE1&2]  32.77,42.93 270 top
SJ10  [SJ_3_PASTE1&2]  51.05,42.93 270 top
SJ11  [SJ_3_PASTE1&2]  69.34,42.93 270 top
SJ12  [SJ_3_PASTE1&2]  87.63,42.93 270 top
SJ13  [SJ_3_PASTE1&2]  105.92,42.93 270 top
SJ14  [SJ_3_PASTE1&2]  124.21,42.93 270 top
SJ15  [SJ_3_PASTE1&2]  14.48,65.02 270 top
SJ16  [SJ_3_PASTE1&2]  32.77,65.02 270 top
SJ17  [SJ_3_PASTE1&2]  51.05,65.02 270 top
SJ18  [SJ_3_PASTE1&2]  69.34,65.02 270 top
SJ19  [SJ_3_PASTE1&2]  87.63,65.02 270 top
SJ20  [SJ_3_PASTE1&2]  105.92,65.02 270 top
SJ21  [SJ_3_PASTE1&2]  124.21,65.02 270 top
SJ22  [SJ_3_PASTE1&2]  14.48,87.12 270 top
SJ23  [SJ_3_PASTE1&2]  32.77,87.12 270 top
SJ24  [SJ_3_PASTE1&2]  51.05,87.12 270 top
SJ25  [SJ_3_PASTE1&2]  69.34,87.12 270 top
SJ26  [SJ_3_PASTE1&2]  87.63,87.12 270 top
SJ27  [SJ_3_PASTE1&2]  105.92,87.12 270 top
SJ28  [SJ_3_PASTE1&2]  124.21,87.12 270 top
SJ29  [SJ_3_PASTE1&2]  14.48,109.22 270 top
SJ30  [SJ_3_PASTE1&2]  32.77,109.22 270 top
SJ31  [SJ_3_PASTE1&2]  51.05,109.22 270 top
SJ32  [SJ_3_PASTE1&2]  69.34,109.22 270 top
SJ33  [SJ_3_PASTE1&2]  87.63,109.22 270 top
SJ34  [SJ_3_PASTE1&2]  105.92,109.22 270 top
SJ35  [SJ_3_PASTE1&2]  124.21,109.22 270 top
U1  ITG-32001:1  [QFN-24_ITG3200_1:1]  15.75,15.75 270 top
U2  ITG-32001:1  [QFN-24_ITG3200_1:1]  34.04,15.75 270 top
U3  ITG-32001:1  [QFN-24_ITG3200_1:1]  52.32,15.75 270 top
U4  ITG-32001:1  [QFN-24_ITG3200_1:1]  70.61,15.75 270 top
U5  ITG-32001:1  [QFN-24_ITG3200_1:1]  88.9,15.75 270 top
U6  ITG-32001:1  [QFN-24_ITG3200_1:1]  107.19,15.75 270 top
U7  ITG-32001:1  [QFN-24_ITG3200_1:1]  125.48,15.75 270 top
U8  ITG-32001:1  [QFN-24_ITG3200_1:1]  15.75,37.85 270 top
U9  ITG-32001:1  [QFN-24_ITG3200_1:1]  34.04,37.85 270 top
U10  ITG-32001:1  [QFN-24_ITG3200_1:1]  52.32,37.85 270 top
U11  ITG-32001:1  [QFN-24_ITG3200_1:1]  70.61,37.85 270 top
U12  ITG-32001:1  [QFN-24_ITG3200_1:1]  88.9,37.85 270 top
U13  ITG-32001:1  [QFN-24_ITG3200_1:1]  107.19,37.85 270 top
U14  ITG-32001:1  [QFN-24_ITG3200_1:1]  125.48,37.85 270 top
U15  ITG-32001:1  [QFN-24_ITG3200_1:1]  15.75,59.94 270 top
U16  ITG-32001:1  [QFN-24_ITG3200_1:1]  34.04,59.94 270 top
U17  ITG-32001:1  [QFN-24_ITG3200_1:1]  52.32,59.94 270 top
U18  ITG-32001:1  [QFN-24_ITG3200_1:1]  70.61,59.94 270 top
U19  ITG-32001:1  [QFN-24_ITG3200_1:1]  88.9,59.94 270 top
U20  ITG-32001:1  [QFN-24_ITG3200_1:1]  107.19,59.94 270 top
U21  ITG-32001:1  [QFN-24_ITG3200_1:1]  125.48,59.94 270 top
U22  ITG-32001:1  [QFN-24_ITG3200_1:1]  15.75,82.04 270 top
U23  ITG-32001:1  [QFN-24_ITG3200_1:1]  34.04,82.04 270 top
U24  ITG-32001:1  [QFN-24_ITG3200_1:1]  52.32,82.04 270 top
U25  ITG-32001:1  [QFN-24_ITG3200_1:1]  70.61,82.04 270 top
U26  ITG-32001:1  [QFN-24_ITG3200_1:1]  88.9,82.04 270 top
U27  ITG-32001:1  [QFN-24_ITG3200_1:1]  107.19,82.04 270 top
U28  ITG-32001:1  [QFN-24_ITG3200_1:1]  125.48,82.04 270 top
U29  ITG-32001:1  [QFN-24_ITG3200_1:1]  15.75,104.14 270 top
U30  ITG-32001:1  [QFN-24_ITG3200_1:1]  34.04,104.14 270 top
U31  ITG-32001:1  [QFN-24_ITG3200_1:1]  52.32,104.14 270 top
U32  ITG-32001:1  [QFN-24_ITG3200_1:1]  70.61,104.14 270 top
U33  ITG-32001:1  [QFN-24_ITG3200_1:1]  88.9,104.14 270 top
U34  ITG-32001:1  [QFN-24_ITG3200_1:1]  107.19,104.14 270 top
U35  ITG-32001:1  [QFN-24_ITG3200_1:1]  125.48,104.14 270 top
U$1  [STAND-OFF-TIGHT]  22.1,9.4 0 top
U$2  [STAND-OFF-TIGHT]  9.4,9.4 0 top
U$3  [STAND-OFF-TIGHT]  40.39,9.4 0 top
U$4  [STAND-OFF-TIGHT]  27.69,9.4 0 top
U$5  [STAND-OFF-TIGHT]  58.67,9.4 0 top
U$6  [STAND-OFF-TIGHT]  45.97,9.4 0 top
U$7  [STAND-OFF-TIGHT]  76.96,9.4 0 top
U$8  [STAND-OFF-TIGHT]  64.26,9.4 0 top
U$9  [STAND-OFF-TIGHT]  95.25,9.4 0 top
U$10  [STAND-OFF-TIGHT]  82.55,9.4 0 top
U$11  [STAND-OFF-TIGHT]  113.54,9.4 0 top
U$12  [STAND-OFF-TIGHT]  100.84,9.4 0 top
U$13  [STAND-OFF-TIGHT]  131.83,9.4 0 top
U$14  [STAND-OFF-TIGHT]  119.13,9.4 0 top
U$15  [STAND-OFF-TIGHT]  22.1,31.5 0 top
U$16  [STAND-OFF-TIGHT]  9.4,31.5 0 top
U$17  [STAND-OFF-TIGHT]  40.39,31.5 0 top
U$18  [STAND-OFF-TIGHT]  27.69,31.5 0 top
U$19  [STAND-OFF-TIGHT]  58.67,31.5 0 top
U$20  [STAND-OFF-TIGHT]  45.97,31.5 0 top
U$21  [STAND-OFF-TIGHT]  76.96,31.5 0 top
U$22  [STAND-OFF-TIGHT]  64.26,31.5 0 top
U$23  [STAND-OFF-TIGHT]  95.25,31.5 0 top
U$24  [STAND-OFF-TIGHT]  82.55,31.5 0 top
U$25  [STAND-OFF-TIGHT]  113.54,31.5 0 top
U$26  [STAND-OFF-TIGHT]  100.84,31.5 0 top
U$27  [STAND-OFF-TIGHT]  131.83,31.5 0 top
U$28  [STAND-OFF-TIGHT]  119.13,31.5 0 top
U$29  [STAND-OFF-TIGHT]  22.1,53.59 0 top
U$30  [STAND-OFF-TIGHT]  9.4,53.59 0 top
U$31  [STAND-OFF-TIGHT]  40.39,53.59 0 top
U$32  [STAND-OFF-TIGHT]  27.69,53.59 0 top
U$33  [STAND-OFF-TIGHT]  58.67,53.59 0 top
U$34  [STAND-OFF-TIGHT]  45.97,53.59 0 top
U$35  [STAND-OFF-TIGHT]  76.96,53.59 0 top
U$36  [STAND-OFF-TIGHT]  64.26,53.59 0 top
U$37  [STAND-OFF-TIGHT]  95.25,53.59 0 top
U$38  [STAND-OFF-TIGHT]  82.55,53.59 0 top
U$39  [STAND-OFF-TIGHT]  113.54,53.59 0 top
U$40  [STAND-OFF-TIGHT]  100.84,53.59 0 top
U$41  [STAND-OFF-TIGHT]  131.83,53.59 0 top
U$42  [STAND-OFF-TIGHT]  119.13,53.59 0 top
U$43  [STAND-OFF-TIGHT]  22.1,75.69 0 top
U$44  [STAND-OFF-TIGHT]  9.4,75.69 0 top
U$45  [STAND-OFF-TIGHT]  40.39,75.69 0 top
U$46  [STAND-OFF-TIGHT]  27.69,75.69 0 top
U$47  [STAND-OFF-TIGHT]  58.67,75.69 0 top
U$48  [STAND-OFF-TIGHT]  45.97,75.69 0 top
U$49  [STAND-OFF-TIGHT]  76.96,75.69 0 top
U$50  [STAND-OFF-TIGHT]  64.26,75.69 0 top
U$51  [STAND-OFF-TIGHT]  95.25,75.69 0 top
U$52  [STAND-OFF-TIGHT]  82.55,75.69 0 top
U$53  [STAND-OFF-TIGHT]  113.54,75.69 0 top
U$54  [STAND-OFF-TIGHT]  100.84,75.69 0 top
U$55  [STAND-OFF-TIGHT]  131.83,75.69 0 top
U$56  [STAND-OFF-TIGHT]  119.13,75.69 0 top
U$57  [STAND-OFF-TIGHT]  22.1,97.79 0 top
U$58  [STAND-OFF-TIGHT]  9.4,97.79 0 top
U$59  [STAND-OFF-TIGHT]  40.39,97.79 0 top
U$60  [STAND-OFF-TIGHT]  27.69,97.79 0 top
U$61  [STAND-OFF-TIGHT]  58.67,97.79 0 top
U$62  [STAND-OFF-TIGHT]  45.97,97.79 0 top
U$63  [STAND-OFF-TIGHT]  76.96,97.79 0 top
U$64  [STAND-OFF-TIGHT]  64.26,97.79 0 top
U$65  [STAND-OFF-TIGHT]  95.25,97.79 0 top
U$66  [STAND-OFF-TIGHT]  82.55,97.79 0 top
U$67  [STAND-OFF-TIGHT]  113.54,97.79 0 top
U$68  [STAND-OFF-TIGHT]  100.84,97.79 0 top
U$69  [STAND-OFF-TIGHT]  131.83,97.79 0 top
U$70  [STAND-OFF-TIGHT]  119.13,97.79 0 top

## Library data of the parts
C1-C140 JP1-JP70 R1 R2 R4 R5 R7 R8 R10 R11 R13 R14 R16 R17 R19 R20 R22 R23 R25 R26 R28 R29 R31 R32 R34 R35 R37 R38 R40 R41 R43 R44 R46 R47 R49 R50 R52 R53 R55 R56 R58 R59 R61 R62 R64 R65 R67 R68 R70 R71 R73 R74 R76 R77 R79 R80 R82 R83 R85 R86 R88 R89 R91 R92 R94 R95 R97 R98 R100 R101 R103 R104 SJ1-SJ35 = SparkFun
E$1 E$4 E$5 FID1-FID70 LOGO1-LOGO70 = SparkFun-Aesthetics
R3 R6 R9 R12 R15 R18 R21 R24 R27 R30 R33 R36 R39 R42 R45 R48 R51 R54 R57 R60 R63 R66 R69 R72 R75 R78 R81 R84 R87 R90 R93 R96 R99 R102 R105 = SparkFun-Resistors; PROD_ID: RES-00824
U1-U35 = SparkFun-DigitalIC
U$1-U$70 = Testing

## Nets
AD0: SJ1.2 U1.9
AD1: SJ2.2 U2.9
AD2: SJ3.2 U3.9
AD3: SJ4.2 U4.9
AD4: SJ5.2 U5.9
AD5: SJ6.2 U6.9
AD6: SJ7.2 U7.9
AD7: SJ8.2 U8.9
AD8: SJ9.2 U9.9
AD9: SJ10.2 U10.9
AD10: SJ11.2 U11.9
AD11: SJ12.2 U12.9
AD12: SJ13.2 U13.9
AD13: SJ14.2 U14.9
AD14: SJ15.2 U15.9
AD15: SJ16.2 U16.9
AD16: SJ17.2 U17.9
AD17: SJ18.2 U18.9
AD18: SJ19.2 U19.9
AD19: SJ20.2 U20.9
AD20: SJ21.2 U21.9
AD21: SJ22.2 U22.9
AD22: SJ23.2 U23.9
AD23: SJ24.2 U24.9
AD24: SJ25.2 U25.9
AD25: SJ26.2 U26.9
AD26: SJ27.2 U27.9
AD27: SJ28.2 U28.9
AD28: SJ29.2 U29.9
AD29: SJ30.2 U30.9
AD30: SJ31.2 U31.9
AD31: SJ32.2 U32.9
AD32: SJ33.2 U33.9
AD33: SJ34.2 U34.9
AD34: SJ35.2 U35.9
CLKIN: JP2.5 JP6.2 U1.1
CLKIN1: JP1.5 JP3.2 U2.1
CLKIN2: JP4.5 JP5.2 U3.1
CLKIN3: JP7.5 JP8.2 U4.1
CLKIN4: JP9.5 JP10.2 U5.1
CLKIN5: JP11.5 JP12.2 U6.1
CLKIN6: JP13.5 JP14.2 U7.1
CLKIN7: JP15.5 JP16.2 U8.1
CLKIN8: JP17.5 JP18.2 U9.1
CLKIN9: JP19.5 JP20.2 U10.1
CLKIN10: JP21.5 JP22.2 U11.1
CLKIN11: JP23.5 JP24.2 U12.1
CLKIN12: JP25.5 JP26.2 U13.1
CLKIN13: JP27.5 JP28.2 U14.1
CLKIN14: JP29.5 JP30.2 U15.1
CLKIN15: JP31.5 JP32.2 U16.1
CLKIN16: JP33.5 JP34.2 U17.1
CLKIN17: JP35.5 JP36.2 U18.1
CLKIN18: JP37.5 JP38.2 U19.1
CLKIN19: JP39.5 JP40.2 U20.1
CLKIN20: JP41.5 JP42.2 U21.1
CLKIN21: JP43.5 JP44.2 U22.1
CLKIN22: JP45.5 JP46.2 U23.1
CLKIN23: JP47.5 JP48.2 U24.1
CLKIN24: JP49.5 JP50.2 U25.1
CLKIN25: JP51.5 JP52.2 U26.1
CLKIN26: JP53.5 JP54.2 U27.1
CLKIN27: JP55.5 JP56.2 U28.1
CLKIN28: JP57.5 JP58.2 U29.1
CLKIN29: JP59.5 JP60.2 U30.1
CLKIN30: JP61.5 JP62.2 U31.1
CLKIN31: JP63.5 JP64.2 U32.1
CLKIN32: JP65.5 JP66.2 U33.1
CLKIN33: JP67.5 JP68.2 U34.1
CLKIN34: JP69.5 JP70.2 U35.1
GND: C1.2 C2.2 C3.2 C4.2 JP2.3 JP6.1 SJ1.3 U1.11 U1.18
GND1: C5.2 C6.2 C7.2 C8.2 JP1.3 JP3.1 SJ2.3 U2.11 U2.18
GND2: C9.2 C10.2 C11.2 C12.2 JP4.3 JP5.1 SJ3.3 U3.11 U3.18
GND3: C13.2 C14.2 C15.2 C16.2 JP7.3 JP8.1 SJ4.3 U4.11 U4.18
GND4: C17.2 C18.2 C19.2 C20.2 JP9.3 JP10.1 SJ5.3 U5.11 U5.18
GND5: C21.2 C22.2 C23.2 C24.2 JP11.3 JP12.1 SJ6.3 U6.11 U6.18
GND6: C25.2 C26.2 C27.2 C28.2 JP13.3 JP14.1 SJ7.3 U7.11 U7.18
GND7: C29.2 C30.2 C31.2 C32.2 JP15.3 JP16.1 SJ8.3 U8.11 U8.18
GND8: C33.2 C34.2 C35.2 C36.2 JP17.3 JP18.1 SJ9.3 U9.11 U9.18
GND9: C37.2 C38.2 C39.2 C40.2 JP19.3 JP20.1 SJ10.3 U10.11 U10.18
GND10: C41.2 C42.2 C43.2 C44.2 JP21.3 JP22.1 SJ11.3 U11.11 U11.18
GND11: C45.2 C46.2 C47.2 C48.2 JP23.3 JP24.1 SJ12.3 U12.11 U12.18
GND12: C49.2 C50.2 C51.2 C52.2 JP25.3 JP26.1 SJ13.3 U13.11 U13.18
GND13: C53.2 C54.2 C55.2 C56.2 JP27.3 JP28.1 SJ14.3 U14.11 U14.18
GND14: C57.2 C58.2 C59.2 C60.2 JP29.3 JP30.1 SJ15.3 U15.11 U15.18
GND15: C61.2 C62.2 C63.2 C64.2 JP31.3 JP32.1 SJ16.3 U16.11 U16.18
GND16: C65.2 C66.2 C67.2 C68.2 JP33.3 JP34.1 SJ17.3 U17.11 U17.18
GND17: C69.2 C70.2 C71.2 C72.2 JP35.3 JP36.1 SJ18.3 U18.11 U18.18
GND18: C73.2 C74.2 C75.2 C76.2 JP37.3 JP38.1 SJ19.3 U19.11 U19.18
GND19: C77.2 C78.2 C79.2 C80.2 JP39.3 JP40.1 SJ20.3 U20.11 U20.18
GND20: C81.2 C82.2 C83.2 C84.2 JP41.3 JP42.1 SJ21.3 U21.11 U21.18
GND21: C85.2 C86.2 C87.2 C88.2 JP43.3 JP44.1 SJ22.3 U22.11 U22.18
GND22: C89.2 C90.2 C91.2 C92.2 JP45.3 JP46.1 SJ23.3 U23.11 U23.18
GND23: C93.2 C94.2 C95.2 C96.2 JP47.3 JP48.1 SJ24.3 U24.11 U24.18
GND24: C97.2 C98.2 C99.2 C100.2 JP49.3 JP50.1 SJ25.3 U25.11 U25.18
GND25: C101.2 C102.2 C103.2 C104.2 JP51.3 JP52.1 SJ26.3 U26.11 U26.18
GND26: C105.2 C106.2 C107.2 C108.2 JP53.3 JP54.1 SJ27.3 U27.11 U27.18
GND27: C109.2 C110.2 C111.2 C112.2 JP55.3 JP56.1 SJ28.3 U28.11 U28.18
GND28: C113.2 C114.2 C115.2 C116.2 JP57.3 JP58.1 SJ29.3 U29.11 U29.18
GND29: C117.2 C118.2 C119.2 C120.2 JP59.3 JP60.1 SJ30.3 U30.11 U30.18
GND30: C121.2 C122.2 C123.2 C124.2 JP61.3 JP62.1 SJ31.3 U31.11 U31.18
GND31: C125.2 C126.2 C127.2 C128.2 JP63.3 JP64.1 SJ32.3 U32.11 U32.18
GND32: C129.2 C130.2 C131.2 C132.2 JP65.3 JP66.1 SJ33.3 U33.11 U33.18
GND33: C133.2 C134.2 C135.2 C136.2 JP67.3 JP68.1 SJ34.3 U34.11 U34.18
GND34: C137.2 C138.2 C139.2 C140.2 JP69.3 JP70.1 SJ35.3 U35.11 U35.18
INT: JP2.4 U1.12
INT1: JP1.4 U2.12
INT2: JP4.4 U3.12
INT3: JP7.4 U4.12
INT4: JP9.4 U5.12
INT5: JP11.4 U6.12
INT6: JP13.4 U7.12
INT7: JP15.4 U8.12
INT8: JP17.4 U9.12
INT9: JP19.4 U10.12
INT10: JP21.4 U11.12
INT11: JP23.4 U12.12
INT12: JP25.4 U13.12
INT13: JP27.4 U14.12
INT14: JP29.4 U15.12
INT15: JP31.4 U16.12
INT16: JP33.4 U17.12
INT17: JP35.4 U18.12
INT18: JP37.4 U19.12
INT19: JP39.4 U20.12
INT20: JP41.4 U21.12
INT21: JP43.4 U22.12
INT22: JP45.4 U23.12
INT23: JP47.4 U24.12
INT24: JP49.4 U25.12
INT25: JP51.4 U26.12
INT26: JP53.4 U27.12
INT27: JP55.4 U28.12
INT28: JP57.4 U29.12
INT29: JP59.4 U30.12
INT30: JP61.4 U31.12
INT31: JP63.4 U32.12
INT32: JP65.4 U33.12
INT33: JP67.4 U34.12
INT34: JP69.4 U35.12
N$1: C1.1 U1.20
N$2: C3.1 U1.10
N$3: R3.1 SJ1.1
N$4: C7.1 U2.10
N$5: C5.1 U2.20
N$6: R6.1 SJ2.1
N$7: C11.1 U3.10
N$8: C9.1 U3.20
N$9: R9.1 SJ3.1
N$10: C15.1 U4.10
N$11: C13.1 U4.20
N$12: R12.1 SJ4.1
N$13: C19.1 U5.10
N$14: C17.1 U5.20
N$15: R15.1 SJ5.1
N$16: C23.1 U6.10
N$17: C21.1 U6.20
N$18: R18.1 SJ6.1
N$19: C27.1 U7.10
N$20: C25.1 U7.20
N$21: R21.1 SJ7.1
N$22: C31.1 U8.10
N$23: C29.1 U8.20
N$24: R24.1 SJ8.1
N$25: C35.1 U9.10
N$26: C33.1 U9.20
N$27: R27.1 SJ9.1
N$28: C39.1 U10.10
N$29: C37.1 U10.20
N$30: R30.1 SJ10.1
N$31: C43.1 U11.10
N$32: C41.1 U11.20
N$33: R33.1 SJ11.1
N$34: C47.1 U12.10
N$35: C45.1 U12.20
N$36: R36.1 SJ12.1
N$37: C51.1 U13.10
N$38: C49.1 U13.20
N$39: R39.1 SJ13.1
N$40: C55.1 U14.10
N$41: C53.1 U14.20
N$42: R42.1 SJ14.1
N$43: C59.1 U15.10
N$44: C57.1 U15.20
N$45: R45.1 SJ15.1
N$46: C63.1 U16.10
N$47: C61.1 U16.20
N$48: R48.1 SJ16.1
N$49: C67.1 U17.10
N$50: C65.1 U17.20
N$51: R51.1 SJ17.1
N$52: C71.1 U18.10
N$53: C69.1 U18.20
N$54: R54.1 SJ18.1
N$55: C75.1 U19.10
N$56: C73.1 U19.20
N$57: R57.1 SJ19.1
N$58: C79.1 U20.10
N$59: C77.1 U20.20
N$60: R60.1 SJ20.1
N$61: C83.1 U21.10
N$62: C81.1 U21.20
N$63: R63.1 SJ21.1
N$64: C87.1 U22.10
N$65: C85.1 U22.20
N$66: R66.1 SJ22.1
N$67: C91.1 U23.10
N$68: C89.1 U23.20
N$69: R69.1 SJ23.1
N$70: C95.1 U24.10
N$71: C93.1 U24.20
N$72: R72.1 SJ24.1
N$73: C99.1 U25.10
N$74: C97.1 U25.20
N$75: R75.1 SJ25.1
N$76: C103.1 U26.10
N$77: C101.1 U26.20
N$78: R78.1 SJ26.1
N$79: C107.1 U27.10
N$80: C105.1 U27.20
N$81: R81.1 SJ27.1
N$82: C111.1 U28.10
N$83: C109.1 U28.20
N$84: R84.1 SJ28.1
N$85: C115.1 U29.10
N$86: C113.1 U29.20
N$87: R87.1 SJ29.1
N$88: C119.1 U30.10
N$89: C117.1 U30.20
N$90: R90.1 SJ30.1
N$91: C123.1 U31.10
N$92: C121.1 U31.20
N$93: R93.1 SJ31.1
N$94: C127.1 U32.10
N$95: C125.1 U32.20
N$96: R96.1 SJ32.1
N$97: C131.1 U33.10
N$98: C129.1 U33.20
N$99: R99.1 SJ33.1
N$100: C135.1 U34.10
N$101: C133.1 U34.20
N$102: R102.1 SJ34.1
N$103: C139.1 U35.10
N$104: C137.1 U35.20
N$105: R105.1 SJ35.1
SCL: JP2.7 R2.1 U1.23
SCL1: JP1.7 R5.1 U2.23
SCL2: JP4.7 R8.1 U3.23
SCL3: JP7.7 R11.1 U4.23
SCL4: JP9.7 R14.1 U5.23
SCL5: JP11.7 R17.1 U6.23
SCL6: JP13.7 R20.1 U7.23
SCL7: JP15.7 R23.1 U8.23
SCL8: JP17.7 R26.1 U9.23
SCL9: JP19.7 R29.1 U10.23
SCL10: JP21.7 R32.1 U11.23
SCL11: JP23.7 R35.1 U12.23
SCL12: JP25.7 R38.1 U13.23
SCL13: JP27.7 R41.1 U14.23
SCL14: JP29.7 R44.1 U15.23
SCL15: JP31.7 R47.1 U16.23
SCL16: JP33.7 R50.1 U17.23
SCL17: JP35.7 R53.1 U18.23
SCL18: JP37.7 R56.1 U19.23
SCL19: JP39.7 R59.1 U20.23
SCL20: JP41.7 R62.1 U21.23
SCL21: JP43.7 R65.1 U22.23
SCL22: JP45.7 R68.1 U23.23
SCL23: JP47.7 R71.1 U24.23
SCL24: JP49.7 R74.1 U25.23
SCL25: JP51.7 R77.1 U26.23
SCL26: JP53.7 R80.1 U27.23
SCL27: JP55.7 R83.1 U28.23
SCL28: JP57.7 R86.1 U29.23
SCL29: JP59.7 R89.1 U30.23
SCL30: JP61.7 R92.1 U31.23
SCL31: JP63.7 R95.1 U32.23
SCL32: JP65.7 R98.1 U33.23
SCL33: JP67.7 R101.1 U34.23
SCL34: JP69.7 R104.1 U35.23
SDA: JP2.6 R1.1 U1.24
SDA1: JP1.6 R4.1 U2.24
SDA2: JP4.6 R7.1 U3.24
SDA3: JP7.6 R10.1 U4.24
SDA4: JP9.6 R13.1 U5.24
SDA5: JP11.6 R16.1 U6.24
SDA6: JP13.6 R19.1 U7.24
SDA7: JP15.6 R22.1 U8.24
SDA8: JP17.6 R25.1 U9.24
SDA9: JP19.6 R28.1 U10.24
SDA10: JP21.6 R31.1 U11.24
SDA11: JP23.6 R34.1 U12.24
SDA12: JP25.6 R37.1 U13.24
SDA13: JP27.6 R40.1 U14.24
SDA14: JP29.6 R43.1 U15.24
SDA15: JP31.6 R46.1 U16.24
SDA16: JP33.6 R49.1 U17.24
SDA17: JP35.6 R52.1 U18.24
SDA18: JP37.6 R55.1 U19.24
SDA19: JP39.6 R58.1 U20.24
SDA20: JP41.6 R61.1 U21.24
SDA21: JP43.6 R64.1 U22.24
SDA22: JP45.6 R67.1 U23.24
SDA23: JP47.6 R70.1 U24.24
SDA24: JP49.6 R73.1 U25.24
SDA25: JP51.6 R76.1 U26.24
SDA26: JP53.6 R79.1 U27.24
SDA27: JP55.6 R82.1 U28.24
SDA28: JP57.6 R85.1 U29.24
SDA29: JP59.6 R88.1 U30.24
SDA30: JP61.6 R91.1 U31.24
SDA31: JP63.6 R94.1 U32.24
SDA32: JP65.6 R97.1 U33.24
SDA33: JP67.6 R100.1 U34.24
SDA34: JP69.6 R103.1 U35.24
VCC: C2.1 JP2.1 R1.2 R2.2 R3.2 U1.13
VCC1: C6.1 JP1.1 R4.2 R5.2 R6.2 U2.13
VCC2: C10.1 JP4.1 R7.2 R8.2 R9.2 U3.13
VCC3: C14.1 JP7.1 R10.2 R11.2 R12.2 U4.13
VCC4: C18.1 JP9.1 R13.2 R14.2 R15.2 U5.13
VCC5: C22.1 JP11.1 R16.2 R17.2 R18.2 U6.13
VCC6: C26.1 JP13.1 R19.2 R20.2 R21.2 U7.13
VCC7: C30.1 JP15.1 R22.2 R23.2 R24.2 U8.13
VCC8: C34.1 JP17.1 R25.2 R26.2 R27.2 U9.13
VCC9: C38.1 JP19.1 R28.2 R29.2 R30.2 U10.13
VCC10: C42.1 JP21.1 R31.2 R32.2 R33.2 U11.13
VCC11: C46.1 JP23.1 R34.2 R35.2 R36.2 U12.13
VCC12: C50.1 JP25.1 R37.2 R38.2 R39.2 U13.13
VCC13: C54.1 JP27.1 R40.2 R41.2 R42.2 U14.13
VCC14: C58.1 JP29.1 R43.2 R44.2 R45.2 U15.13
VCC15: C62.1 JP31.1 R46.2 R47.2 R48.2 U16.13
VCC16: C66.1 JP33.1 R49.2 R50.2 R51.2 U17.13
VCC17: C70.1 JP35.1 R52.2 R53.2 R54.2 U18.13
VCC18: C74.1 JP37.1 R55.2 R56.2 R57.2 U19.13
VCC19: C78.1 JP39.1 R58.2 R59.2 R60.2 U20.13
VCC20: C82.1 JP41.1 R61.2 R62.2 R63.2 U21.13
VCC21: C86.1 JP43.1 R64.2 R65.2 R66.2 U22.13
VCC22: C90.1 JP45.1 R67.2 R68.2 R69.2 U23.13
VCC23: C94.1 JP47.1 R70.2 R71.2 R72.2 U24.13
VCC24: C98.1 JP49.1 R73.2 R74.2 R75.2 U25.13
VCC25: C102.1 JP51.1 R76.2 R77.2 R78.2 U26.13
VCC26: C106.1 JP53.1 R79.2 R80.2 R81.2 U27.13
VCC27: C110.1 JP55.1 R82.2 R83.2 R84.2 U28.13
VCC28: C114.1 JP57.1 R85.2 R86.2 R87.2 U29.13
VCC29: C118.1 JP59.1 R88.2 R89.2 R90.2 U30.13
VCC30: C122.1 JP61.1 R91.2 R92.2 R93.2 U31.13
VCC31: C126.1 JP63.1 R94.2 R95.2 R96.2 U32.13
VCC32: C130.1 JP65.1 R97.2 R98.2 R99.2 U33.13
VCC33: C134.1 JP67.1 R100.2 R101.2 R102.2 U34.13
VCC34: C138.1 JP69.1 R103.2 R104.2 R105.2 U35.13
VLOGIC: C4.1 JP2.2 U1.8
VLOGIC1: C8.1 JP1.2 U2.8
VLOGIC2: C12.1 JP4.2 U3.8
VLOGIC3: C16.1 JP7.2 U4.8
VLOGIC4: C20.1 JP9.2 U5.8
VLOGIC5: C24.1 JP11.2 U6.8
VLOGIC6: C28.1 JP13.2 U7.8
VLOGIC7: C32.1 JP15.2 U8.8
VLOGIC8: C36.1 JP17.2 U9.8
VLOGIC9: C40.1 JP19.2 U10.8
VLOGIC10: C44.1 JP21.2 U11.8
VLOGIC11: C48.1 JP23.2 U12.8
VLOGIC12: C52.1 JP25.2 U13.8
VLOGIC13: C56.1 JP27.2 U14.8
VLOGIC14: C60.1 JP29.2 U15.8
VLOGIC15: C64.1 JP31.2 U16.8
VLOGIC16: C68.1 JP33.2 U17.8
VLOGIC17: C72.1 JP35.2 U18.8
VLOGIC18: C76.1 JP37.2 U19.8
VLOGIC19: C80.1 JP39.2 U20.8
VLOGIC20: C84.1 JP41.2 U21.8
VLOGIC21: C88.1 JP43.2 U22.8
VLOGIC22: C92.1 JP45.2 U23.8
VLOGIC23: C96.1 JP47.2 U24.8
VLOGIC24: C100.1 JP49.2 U25.8
VLOGIC25: C104.1 JP51.2 U26.8
VLOGIC26: C108.1 JP53.2 U27.8
VLOGIC27: C112.1 JP55.2 U28.8
VLOGIC28: C116.1 JP57.2 U29.8
VLOGIC29: C120.1 JP59.2 U30.8
VLOGIC30: C124.1 JP61.2 U31.8
VLOGIC31: C128.1 JP63.2 U32.8
VLOGIC32: C132.1 JP65.2 U33.8
VLOGIC33: C136.1 JP67.2 U34.8
VLOGIC34: C140.1 JP69.2 U35.8

## Tracks (layer width: path | path; a pad name or v marks a point on that pad's centre or on a via)
AD0  (via drill 0.51)
  Top 0.254: U1.9 12.58,16 10.79,17.78 v9.4,17.78 | v12.06,20.83 SJ1.2
  Bottom 0.254: v9.4,17.78 9.4,18.16 v12.06,20.83
AD1  (via drill 0.51)
  Top 0.254: U2.9 30.87,16 29.08,17.78 v27.69,17.78 | v30.35,20.83 SJ2.2
  Bottom 0.254: v27.69,17.78 27.69,18.16 v30.35,20.83
AD2  (via drill 0.51)
  Top 0.254: U3.9 49.15,16 47.37,17.78 v45.97,17.78 | v48.64,20.83 SJ3.2
  Bottom 0.254: v45.97,17.78 45.97,18.16 v48.64,20.83
AD3  (via drill 0.51)
  Top 0.254: U4.9 67.44,16 65.66,17.78 v64.26,17.78 | v66.93,20.83 SJ4.2
  Bottom 0.254: v64.26,17.78 64.26,18.16 v66.93,20.83
AD4  (via drill 0.51)
  Top 0.254: U5.9 85.73,16 83.95,17.78 v82.55,17.78 | v85.22,20.83 SJ5.2
  Bottom 0.254: v82.55,17.78 82.55,18.16 v85.22,20.83
AD5  (via drill 0.51)
  Top 0.254: U6.9 104.02,16 102.23,17.78 v100.84,17.78 | v103.51,20.83 SJ6.2
  Bottom 0.254: v100.84,17.78 100.84,18.16 v103.51,20.83
AD6  (via drill 0.51)
  Top 0.254: U7.9 122.31,16 120.52,17.78 v119.13,17.78 | v121.79,20.83 SJ7.2
  Bottom 0.254: v119.13,17.78 119.13,18.16 v121.79,20.83
AD7  (via drill 0.51)
  Top 0.254: U8.9 12.58,38.1 10.79,39.88 v9.4,39.88 | v12.06,42.93 SJ8.2
  Bottom 0.254: v9.4,39.88 9.4,40.26 v12.06,42.93
AD8  (via drill 0.51)
  Top 0.254: U9.9 30.87,38.1 29.08,39.88 v27.69,39.88 | v30.35,42.93 SJ9.2
  Bottom 0.254: v27.69,39.88 27.69,40.26 v30.35,42.93
AD9  (via drill 0.51)
  Top 0.254: U10.9 49.15,38.1 47.37,39.88 v45.97,39.88 | v48.64,42.93 SJ10.2
  Bottom 0.254: v45.97,39.88 45.97,40.26 v48.64,42.93
AD10  (via drill 0.51)
  Top 0.254: U11.9 67.44,38.1 65.66,39.88 v64.26,39.88 | v66.93,42.93 SJ11.2
  Bottom 0.254: v64.26,39.88 64.26,40.26 v66.93,42.93
AD11  (via drill 0.51)
  Top 0.254: U12.9 85.73,38.1 83.95,39.88 v82.55,39.88 | v85.22,42.93 SJ12.2
  Bottom 0.254: v82.55,39.88 82.55,40.26 v85.22,42.93
AD12  (via drill 0.51)
  Top 0.254: U13.9 104.02,38.1 102.23,39.88 v100.84,39.88 | v103.51,42.93 SJ13.2
  Bottom 0.254: v100.84,39.88 100.84,40.26 v103.51,42.93
AD13  (via drill 0.51)
  Top 0.254: U14.9 122.31,38.1 120.52,39.88 v119.13,39.88 | v121.79,42.93 SJ14.2
  Bottom 0.254: v119.13,39.88 119.13,40.26 v121.79,42.93
AD14  (via drill 0.51)
  Top 0.254: U15.9 12.58,60.19 10.79,61.98 v9.4,61.98 | v12.06,65.02 SJ15.2
  Bottom 0.254: v9.4,61.98 9.4,62.36 v12.06,65.02
AD15  (via drill 0.51)
  Top 0.254: U16.9 30.87,60.19 29.08,61.98 v27.69,61.98 | v30.35,65.02 SJ16.2
  Bottom 0.254: v27.69,61.98 27.69,62.36 v30.35,65.02
AD16  (via drill 0.51)
  Top 0.254: U17.9 49.15,60.19 47.37,61.98 v45.97,61.98 | v48.64,65.02 SJ17.2
  Bottom 0.254: v45.97,61.98 45.97,62.36 v48.64,65.02
AD17  (via drill 0.51)
  Top 0.254: U18.9 67.44,60.19 65.66,61.98 v64.26,61.98 | v66.93,65.02 SJ18.2
  Bottom 0.254: v64.26,61.98 64.26,62.36 v66.93,65.02
AD18  (via drill 0.51)
  Top 0.254: U19.9 85.73,60.19 83.95,61.98 v82.55,61.98 | v85.22,65.02 SJ19.2
  Bottom 0.254: v82.55,61.98 82.55,62.36 v85.22,65.02
AD19  (via drill 0.51)
  Top 0.254: U20.9 104.02,60.19 102.23,61.98 v100.84,61.98 | v103.51,65.02 SJ20.2
  Bottom 0.254: v100.84,61.98 100.84,62.36 v103.51,65.02
AD20  (via drill 0.51)
  Top 0.254: U21.9 122.31,60.19 120.52,61.98 v119.13,61.98 | v121.79,65.02 SJ21.2
  Bottom 0.254: v119.13,61.98 119.13,62.36 v121.79,65.02
AD21  (via drill 0.51)
  Top 0.254: U22.9 12.58,82.29 10.79,84.07 v9.4,84.07 | v12.06,87.12 SJ22.2
  Bottom 0.254: v9.4,84.07 9.4,84.45 v12.06,87.12
AD22  (via drill 0.51)
  Top 0.254: U23.9 30.87,82.29 29.08,84.07 v27.69,84.07 | v30.35,87.12 SJ23.2
  Bottom 0.254: v27.69,84.07 27.69,84.45 v30.35,87.12
AD23  (via drill 0.51)
  Top 0.254: U24.9 49.15,82.29 47.37,84.07 v45.97,84.07 | v48.64,87.12 SJ24.2
  Bottom 0.254: v45.97,84.07 45.97,84.45 v48.64,87.12
AD24  (via drill 0.51)
  Top 0.254: U25.9 67.44,82.29 65.66,84.07 v64.26,84.07 | v66.93,87.12 SJ25.2
  Bottom 0.254: v64.26,84.07 64.26,84.45 v66.93,87.12
AD25  (via drill 0.51)
  Top 0.254: U26.9 85.73,82.29 83.95,84.07 v82.55,84.07 | v85.22,87.12 SJ26.2
  Bottom 0.254: v82.55,84.07 82.55,84.45 v85.22,87.12
AD26  (via drill 0.51)
  Top 0.254: U27.9 104.02,82.29 102.23,84.07 v100.84,84.07 | v103.51,87.12 SJ27.2
  Bottom 0.254: v100.84,84.07 100.84,84.45 v103.51,87.12
AD27  (via drill 0.51)
  Top 0.254: U28.9 122.31,82.29 120.52,84.07 v119.13,84.07 | v121.79,87.12 SJ28.2
  Bottom 0.254: v119.13,84.07 119.13,84.45 v121.79,87.12
AD28  (via drill 0.51)
  Top 0.254: U29.9 12.58,104.39 10.79,106.17 v9.4,106.17 | v12.06,109.22 SJ29.2
  Bottom 0.254: v9.4,106.17 9.4,106.55 v12.06,109.22
AD29  (via drill 0.51)
  Top 0.254: U30.9 30.87,104.39 29.08,106.17 v27.69,106.17 | v30.35,109.22 SJ30.2
  Bottom 0.254: v27.69,106.17 27.69,106.55 v30.35,109.22
AD30  (via drill 0.51)
  Top 0.254: U31.9 49.15,104.39 47.37,106.17 v45.97,106.17 | v48.64,109.22 SJ31.2
  Bottom 0.254: v45.97,106.17 45.97,106.55 v48.64,109.22
AD31  (via drill 0.51)
  Top 0.254: U32.9 67.44,104.39 65.66,106.17 v64.26,106.17 | v66.93,109.22 SJ32.2
  Bottom 0.254: v64.26,106.17 64.26,106.55 v66.93,109.22
AD32  (via drill 0.51)
  Top 0.254: U33.9 85.73,104.39 83.95,106.17 v82.55,106.17 | v85.22,109.22 SJ33.2
  Bottom 0.254: v82.55,106.17 82.55,106.55 v85.22,109.22
AD33  (via drill 0.51)
  Top 0.254: U34.9 104.02,104.39 102.23,106.17 v100.84,106.17 | v103.51,109.22 SJ34.2
  Bottom 0.254: v100.84,106.17 100.84,106.55 v103.51,109.22
AD34  (via drill 0.51)
  Top 0.254: U35.9 122.31,104.39 120.52,106.17 v119.13,106.17 | v121.79,109.22 SJ35.2
  Bottom 0.254: v119.13,106.17 119.13,106.55 v121.79,109.22
CLKIN  (via drill 0.51)
  Top 0.254: U1.1 17.04,18.54 17.3,18.8 v19.18,18.8
  Bottom 0.254: JP2.5 18.29,22.55 JP6.2 17.84,21.28 18.29,20.83 18.29,19.68 v19.18,18.8
CLKIN1  (via drill 0.51)
  Top 0.254: U2.1 35.33,18.54 35.59,18.8 v37.46,18.8
  Bottom 0.254: JP1.5 36.58,22.55 JP3.2 36.13,21.28 36.58,20.83 36.58,19.68 v37.46,18.8
CLKIN2  (via drill 0.51)
  Top 0.254: U3.1 53.62,18.54 53.87,18.8 v55.75,18.8
  Bottom 0.254: JP4.5 54.86,22.55 JP5.2 54.41,21.28 54.86,20.83 54.86,19.68 v55.75,18.8
CLKIN3  (via drill 0.51)
  Top 0.254: U4.1 71.91,18.54 72.16,18.8 v74.04,18.8
  Bottom 0.254: JP7.5 73.15,22.55 JP8.2 72.7,21.28 73.15,20.83 73.15,19.68 v74.04,18.8
CLKIN4  (via drill 0.51)
  Top 0.254: U5.1 90.2,18.54 90.45,18.8 v92.33,18.8
  Bottom 0.254: JP9.5 91.44,22.55 JP10.2 90.99,21.28 91.44,20.83 91.44,19.68 v92.33,18.8
CLKIN5  (via drill 0.51)
  Top 0.254: U6.1 108.48,18.54 108.74,18.8 v110.62,18.8
  Bottom 0.254: JP11.5 109.73,22.55 JP12.2 109.28,21.28 109.73,20.83 109.73,19.68 v110.62,18.8
CLKIN6  (via drill 0.51)
  Top 0.254: U7.1 126.77,18.54 127.03,18.8 v128.91,18.8
  Bottom 0.254: JP13.5 128.02,22.55 JP14.2 127.57,21.28 128.02,20.83 128.02,19.68 v128.91,18.8
CLKIN7  (via drill 0.51)
  Top 0.254: U8.1 17.04,40.64 17.3,40.89 v19.18,40.89
  Bottom 0.254: JP15.5 18.29,44.65 JP16.2 17.84,43.38 18.29,42.93 18.29,41.78 v19.18,40.89
CLKIN8  (via drill 0.51)
  Top 0.254: U9.1 35.33,40.64 35.59,40.89 v37.46,40.89
  Bottom 0.254: JP17.5 36.58,44.65 JP18.2 36.13,43.38 36.58,42.93 36.58,41.78 v37.46,40.89
CLKIN9  (via drill 0.51)
  Top 0.254: U10.1 53.62,40.64 53.87,40.89 v55.75,40.89
  Bottom 0.254: JP19.5 54.86,44.65 JP20.2 54.41,43.38 54.86,42.93 54.86,41.78 v55.75,40.89
CLKIN10  (via drill 0.51)
  Top 0.254: U11.1 71.91,40.64 72.16,40.89 v74.04,40.89
  Bottom 0.254: JP21.5 73.15,44.65 JP22.2 72.7,43.38 73.15,42.93 73.15,41.78 v74.04,40.89
CLKIN11  (via drill 0.51)
  Top 0.254: U12.1 90.2,40.64 90.45,40.89 v92.33,40.89
  Bottom 0.254: JP23.5 91.44,44.65 JP24.2 90.99,43.38 91.44,42.93 91.44,41.78 v92.33,40.89
CLKIN12  (via drill 0.51)
  Top 0.254: U13.1 108.48,40.64 108.74,40.89 v110.62,40.89
  Bottom 0.254: JP25.5 109.73,44.65 JP26.2 109.28,43.38 109.73,42.93 109.73,41.78 v110.62,40.89
CLKIN13  (via drill 0.51)
  Top 0.254: U14.1 126.77,40.64 127.03,40.89 v128.91,40.89
  Bottom 0.254: JP27.5 128.02,44.65 JP28.2 127.57,43.38 128.02,42.93 128.02,41.78 v128.91,40.89
CLKIN14  (via drill 0.51)
  Top 0.254: U15.1 17.04,62.74 17.3,62.99 v19.18,62.99